# Altium PCB Test PCB Rev 1.PcbDoc
Units mil, origin at the board's own origin, x right, y up, seen from the top; angles counter-clockwise.
Board outline 5000 x 3000 mil, 4 copper layers (Top Layer, Layer 1, Layer 2, Bottom Layer), stack 23.756 mil thick; 158 components, 86 nets, 510 pads, 174 vias.
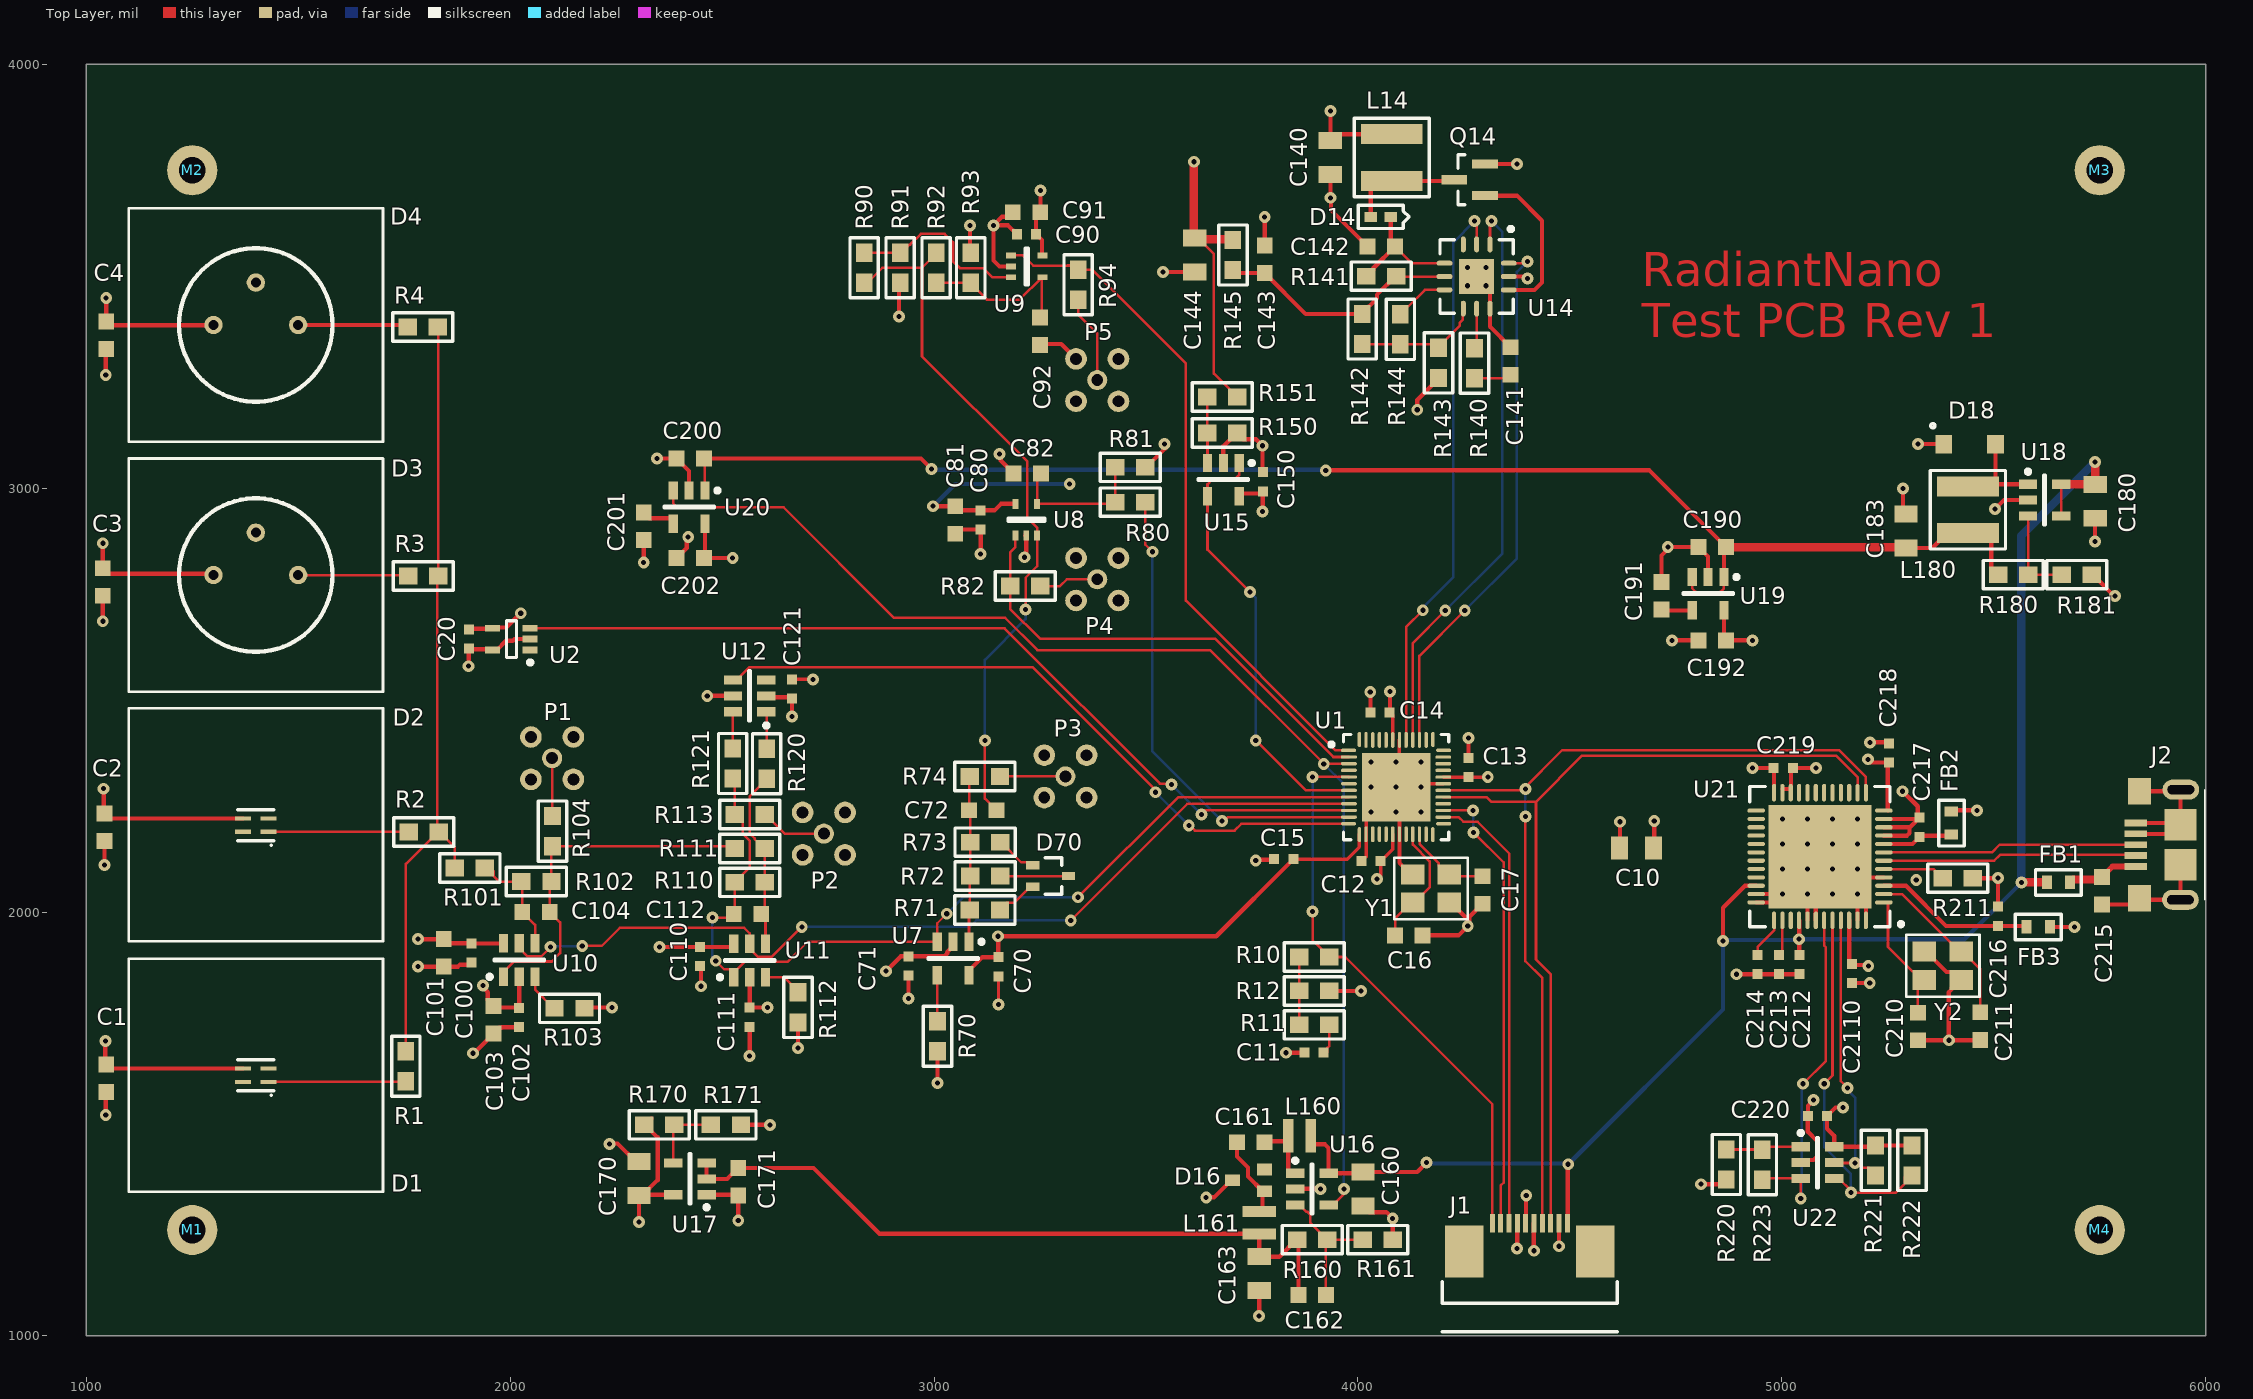
[diagram p0: Top Layer view]
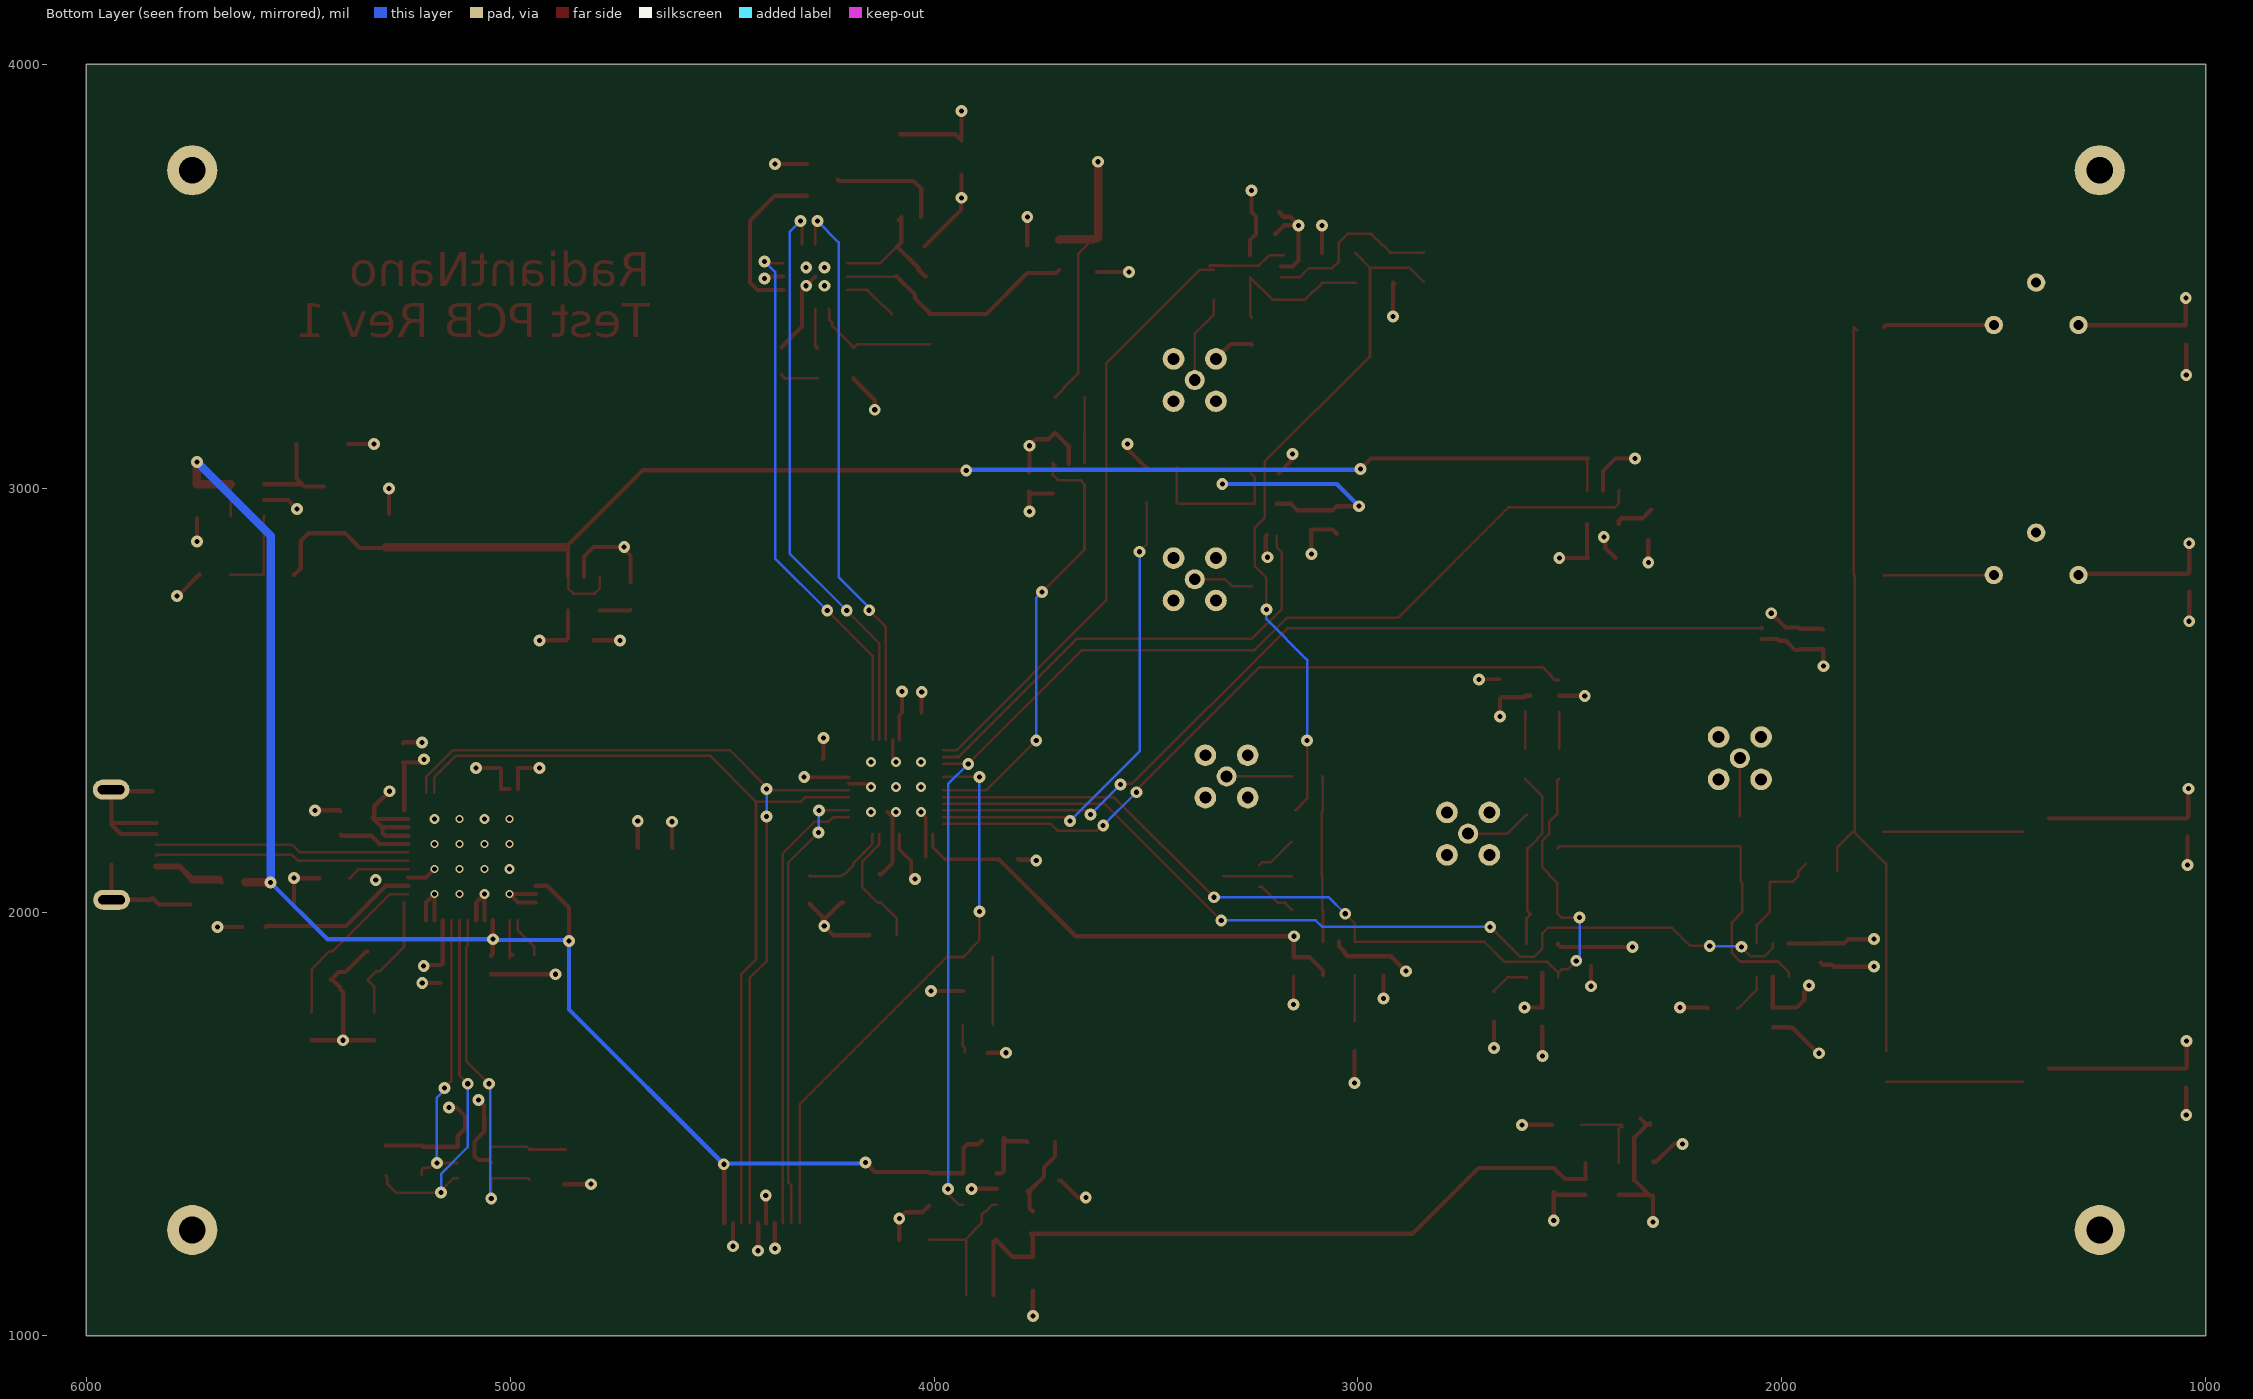
[diagram p1: Bottom Layer view, seen from below]
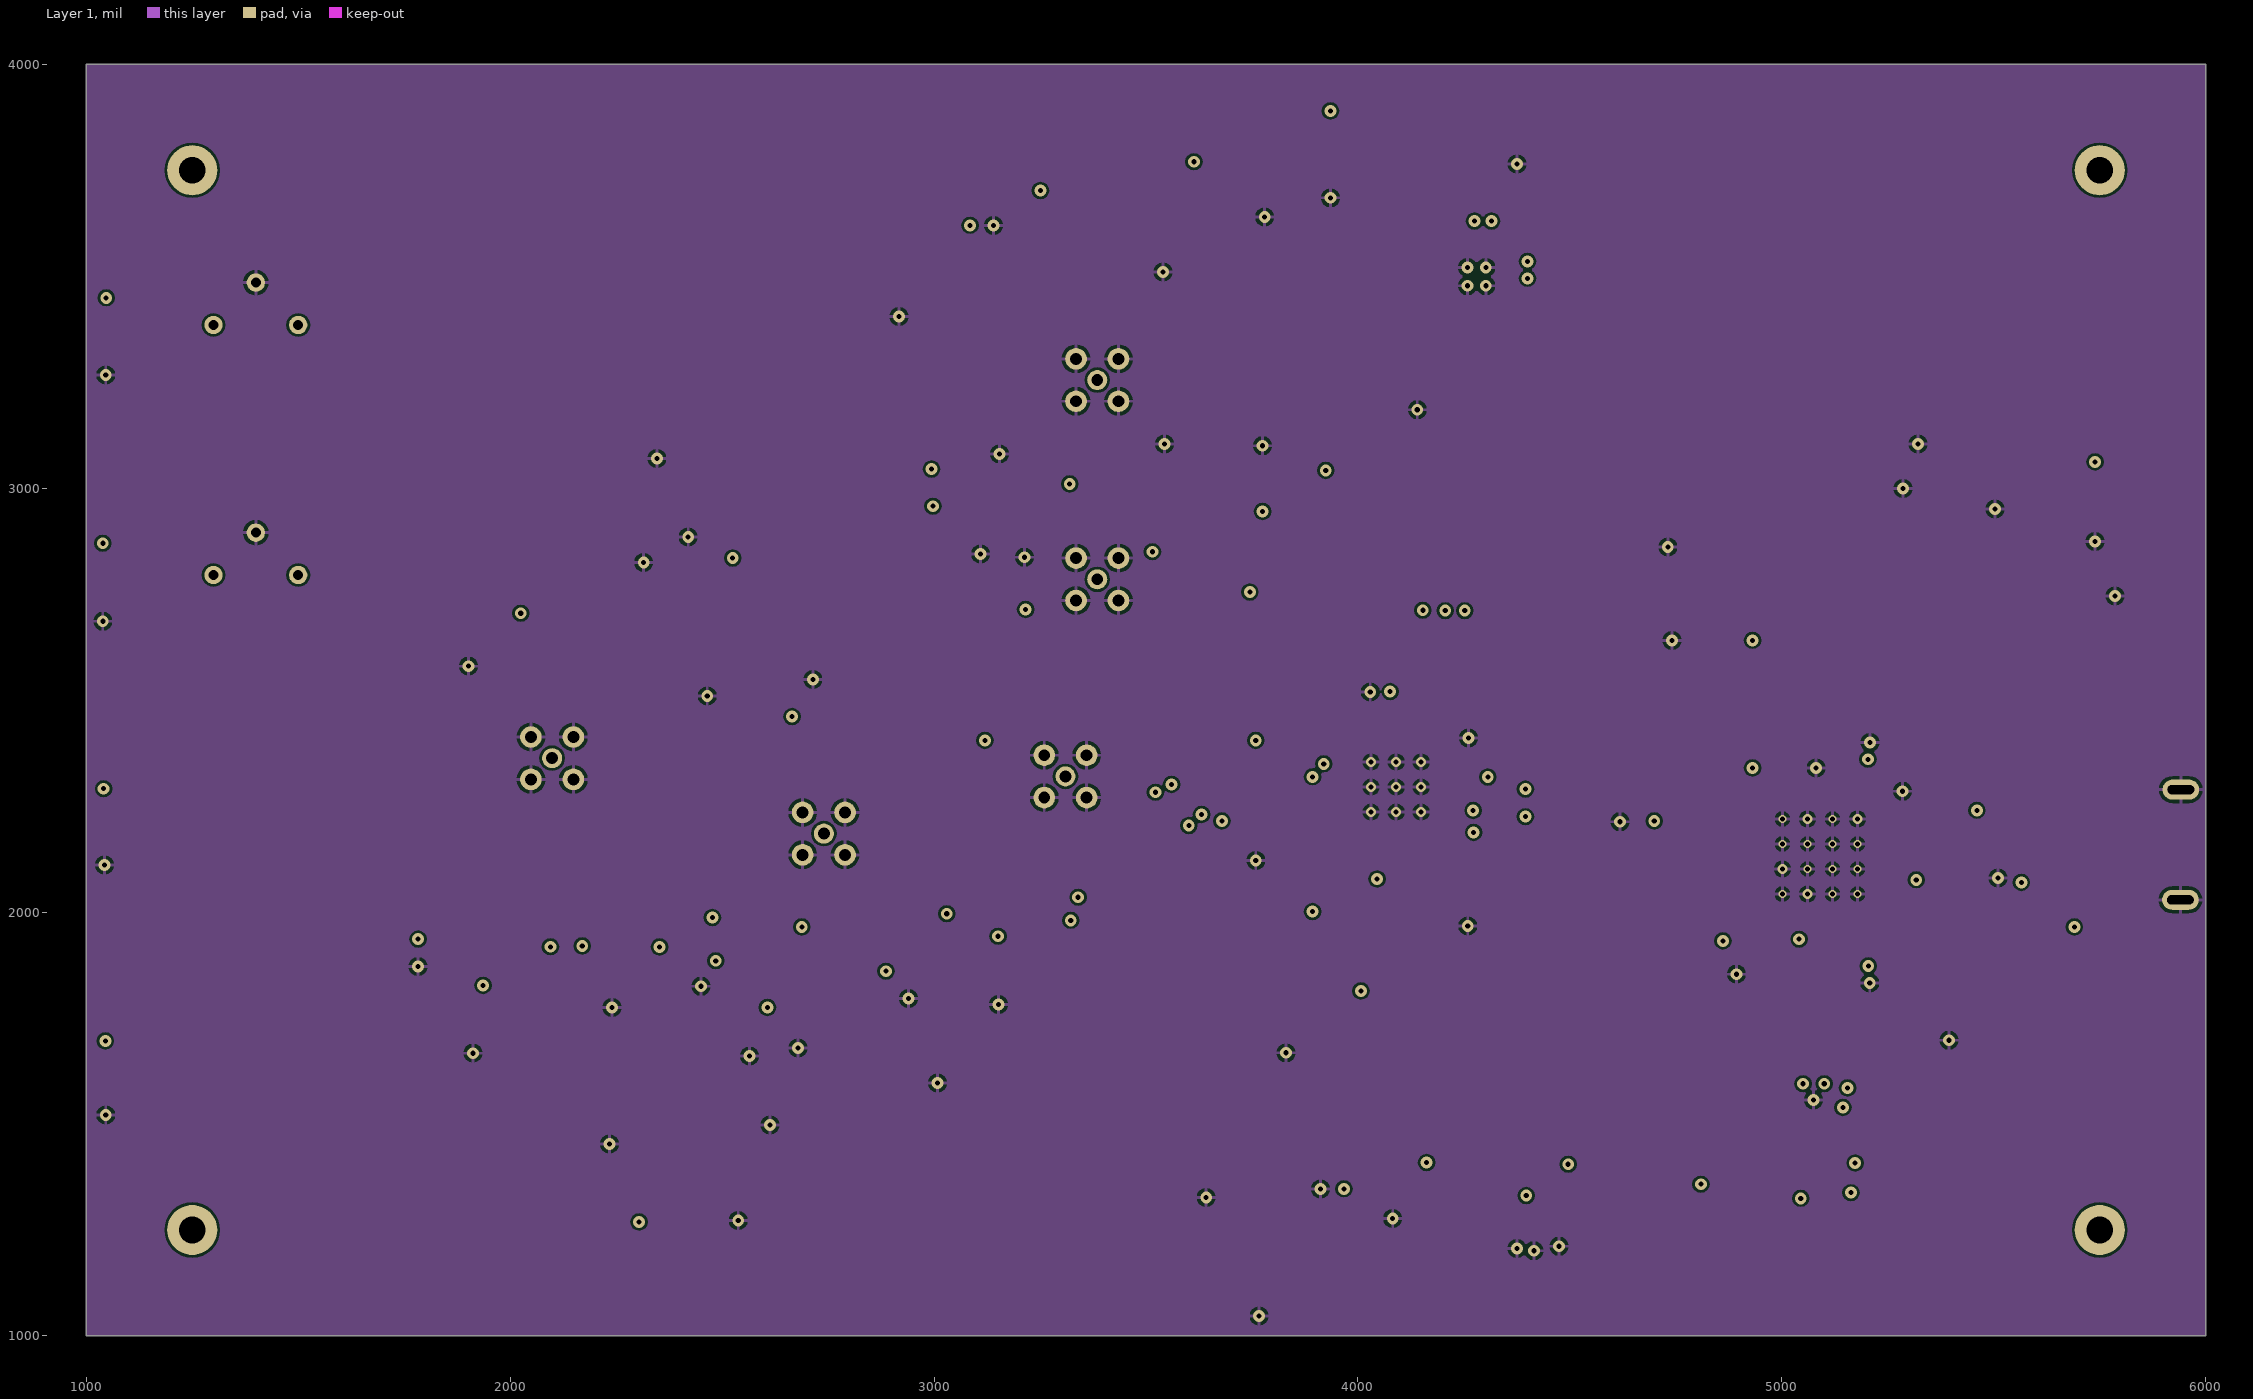
[diagram p2: Layer 1]
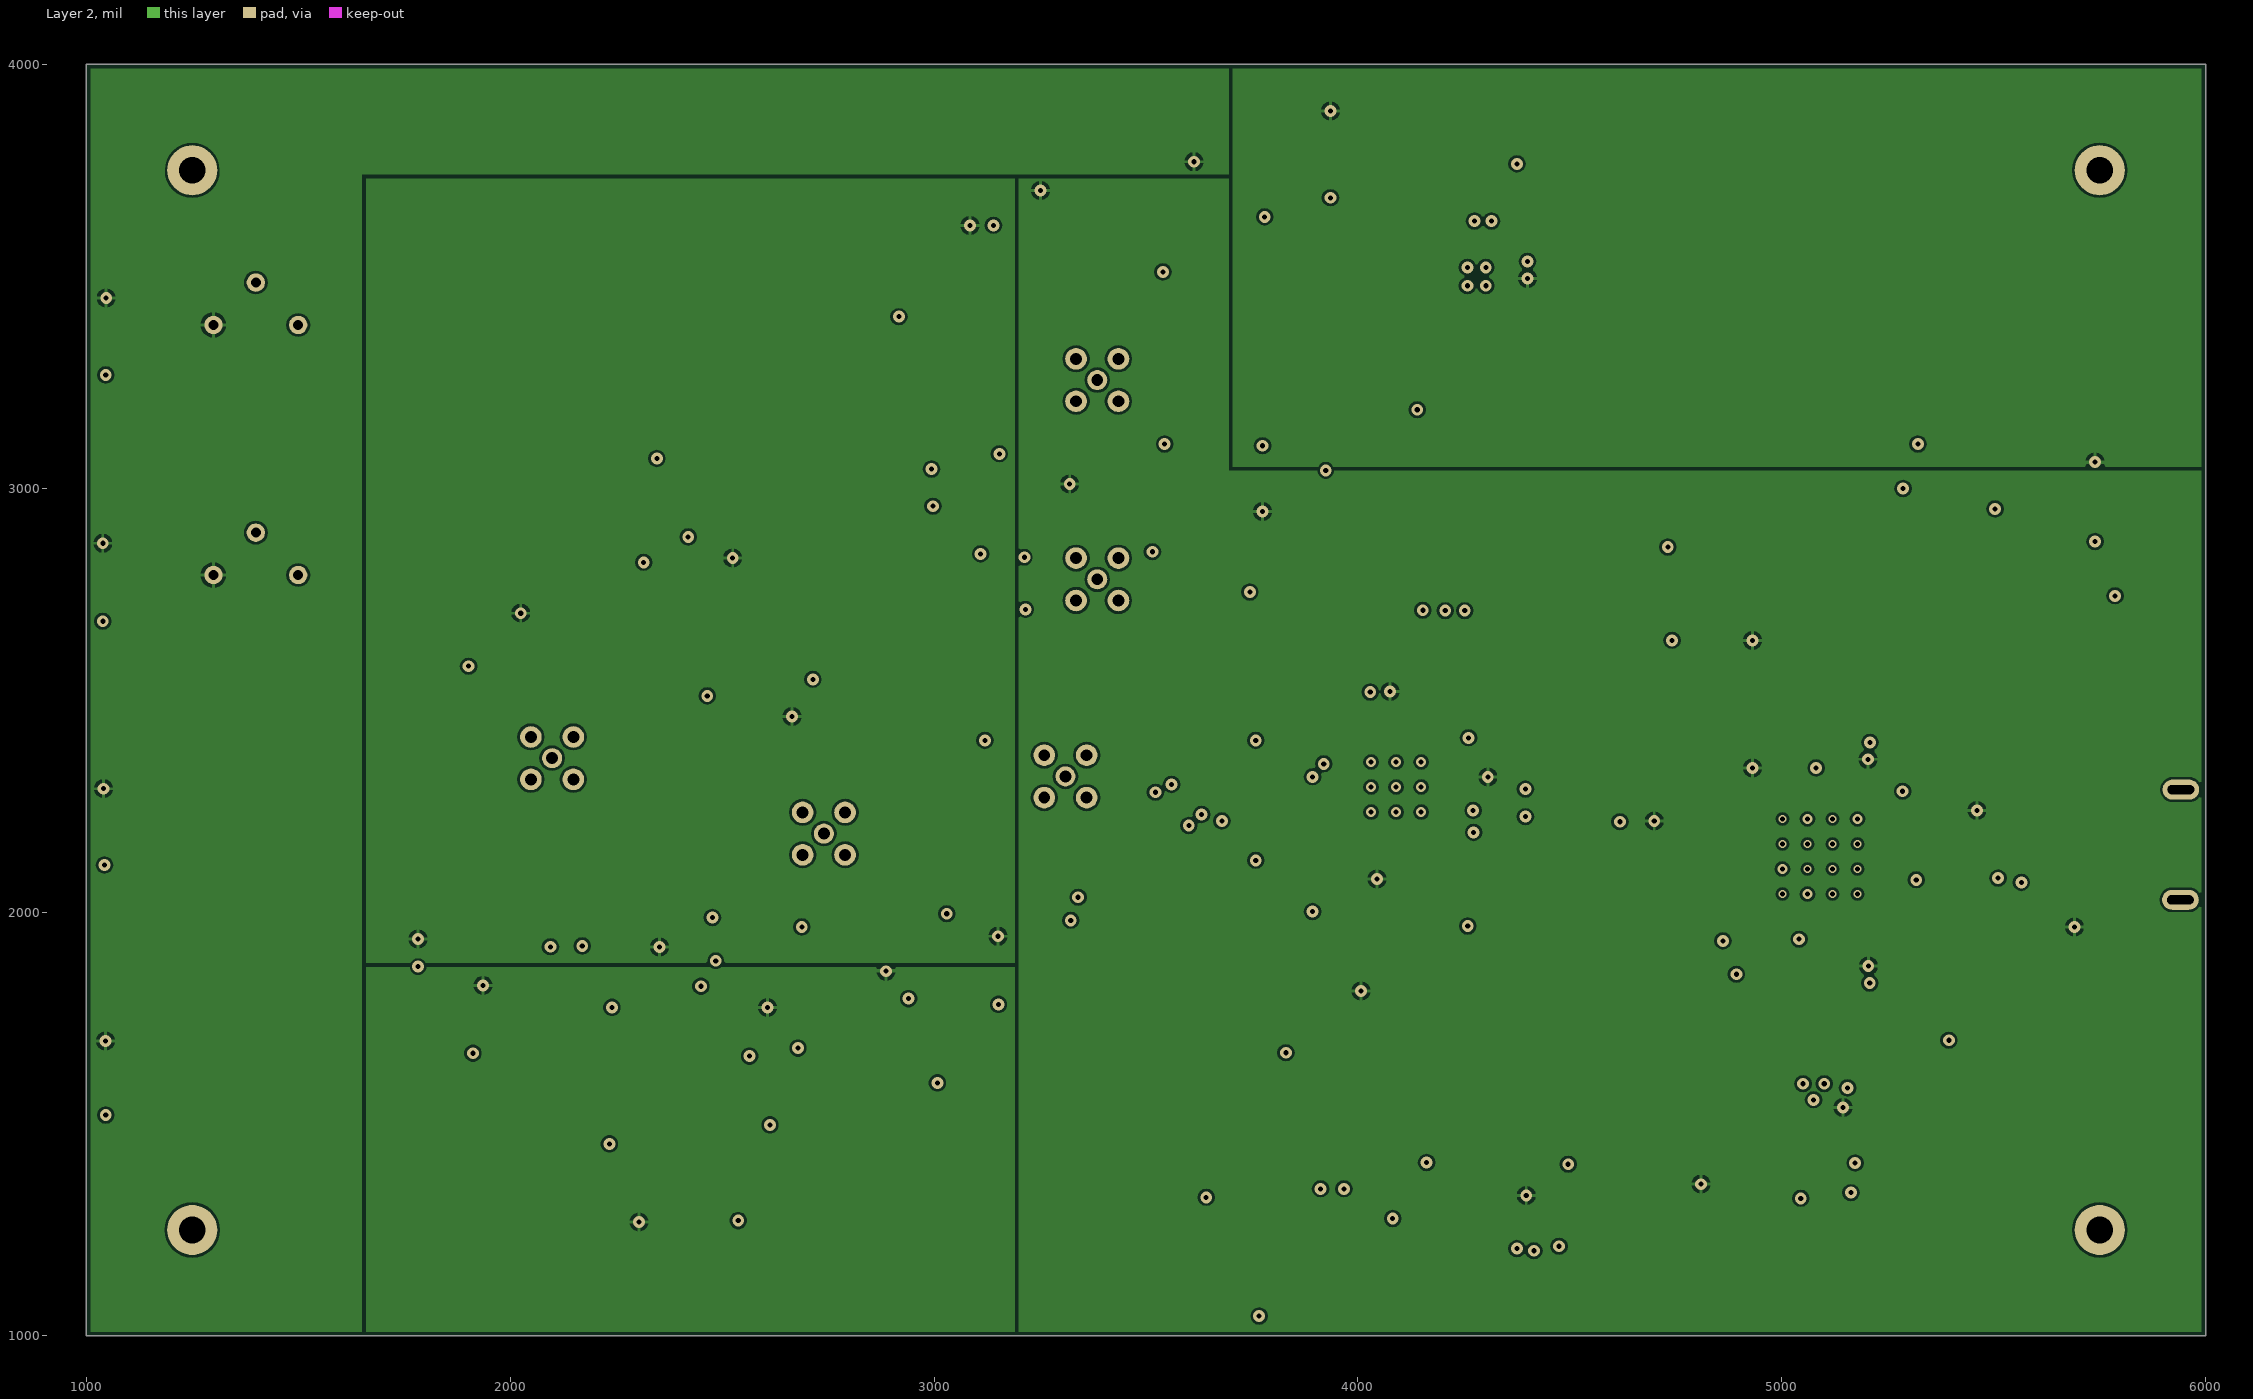
[diagram p3: Layer 2]

## Layer stack, top to bottom
Top Solder: solder mask 0.4, Solder Resist, Dk 3.5
Top Layer: signal copper 1.4
Dielectric 2: prepreg 2.8, PP-006, Dk 4.1
Layer 1: signal copper 1.378
Dielectric 1: dielectric 12.6, FR-4, Dk 4.8
Layer 2: signal copper 1.378
Dielectric 3: prepreg 2.8, PP-006, Dk 4.1
Bottom Layer: signal copper 1.4
Bottom Solder: solder mask 0.4, Solder Resist, Dk 3.5

## Board outline
1000,1000 6000,1000 6000,4000 1000,4000

## Design rules (kind name [scope] priority, off if disabled: settings)
Clearance [All] p1: gap=6 ignorepadtopadclearanceinfootprint=FALSE except(0: Arc-Hole Track-Hole SMDPad-Hole THPad-Hole Via-Hole Fill-Hole Poly-Hole Region-Hole Text-Hole)
HoleSize [All] p1: absolutevalues=TRUE maxlimit=100 minlimit=11.81 maxpercent=80.000 minpercent=20.000
MinimumSolderMaskSliver [All] p1: minsoldermaskwidth=3.75
PlaneClearance [All] p1: clearance=16
PlaneConnect [All] p1: planeconnectstyle=Relief reliefexpansion=14 reliefentries=4 reliefconductorwidth=8 reliefairgap=7
PolygonConnect [All] p1: connectstyle=Relief reliefconductorwidth=8 reliefentries=4 polygonreliefangle="90 Angle" airgapwidth=8
RoomDefinition "6 Power" [InComponentClass('6 Power')] p1: confinementstyle=ConfineOut formatcopy=TRUE lockcomponents=FALSE outline 7290,5965 7900,5965 7900,6275 7290,6275
RoomDefinition "5 SiPM" [InComponentClass('5 SiPM')] p2: confinementstyle=ConfineOut formatcopy=TRUE lockcomponents=FALSE outline 7280,6415 7685,6415 7685,6765 7280,6765
RoomDefinition "4 USB" [InComponentClass('4 USB')] p3: confinementstyle=ConfineOut formatcopy=TRUE lockcomponents=FALSE outline 7290,6805 7975,6805 7975,7305 7290,7305
RoomDefinition "3 Bias Supply" [InComponentClass('3 Bias Supply')] p4: confinementstyle=ConfineOut formatcopy=TRUE lockcomponents=FALSE outline 7285,7540 8025,7540 8025,7860 7285,7860
RoomDefinition "2 Analog" [InComponentClass('2 Analog')] p5: confinementstyle=ConfineOut formatcopy=TRUE lockcomponents=FALSE outline 7265,8075 8060,8075 8060,8355 7265,8355
RoomDefinition "1 PIC" [InComponentClass('1 PIC')] p6: confinementstyle=ConfineOut formatcopy=TRUE lockcomponents=FALSE outline 7270,8460 8045,8460 8045,8995 7270,8995
RoutingVias [All] p1: holewidth=12 width=28 viastyle="Through Hole" minholewidth=11.81 minwidth=23.62 maxholewidth=28 maxwidth=50
SilkToSilkClearance [All] p1: silktosilkclearance=6
SilkToSolderMaskClearance [IsPad] p1: minsilkscreentomaskgap=6 clearancetoexposedcopper=TRUE
SolderMaskExpansion [All] p1: expansion=2 istentingtop=FALSE
Width [All] p1: maxlimit=20 minlimit=6 preferedwidth=6
24 further rules are at their usual default settings.

## Classes and differential pairs
component class "6 Power": C160 C161 C162 C163 C170 C171 C180 C183 C190 C191 C192 C200 C201 C202 D16 D18 L160 L161 L180 R160 R161 R170 R171 R180 R181 U16 U17 U18 U19 U20
component class "5 SiPM": C1 C2 C3 C4 C20 D1 D2 D3 D4 R1 R2 R3 R4 U2
component class "4 USB": C210 C211 C212 C213 C214 C215 C216 C217 C218 C219 C220 C2110 FB1 FB2 FB3 J2 R211 R220 R221 R222 R223 U21 U22 Y2
component class "3 Bias Supply": C140 C141 C142 C143 C144 C150 D14 L14 Q14 R140 R141 R142 R143 R144 R145 R150 R151 U14 U15
component class "2 Analog": C70 C71 C72 C80 C81 C82 C90 C91 C92 C100 C101 C102 C103 C104 C110 C111 C112 C121 D70 P1 P2 P3 P4 P5 R70 R71 R72 R73 R74 R80 R81 R82 R90 R91 R92 R93 R94 R101 R102 R103 R104 R110 R111 R112 R113 R120 R121 U7 U8 U9 U10 U11 U12
component class "1 PIC": C10 C11 C12 C13 C14 C15 C16 C17 J1 M1 M2 M3 M4 R10 R11 R12 U1 Y1

## Components (designator, comment, footprint, x,y, rotation, side; value= is the part's Value field where it differs from the comment)
C1 "0.1uF/100V" C0603 1047,1608.28 r90 top
C2 "0.1uF/100V" C0603 1043,2200.36 r90 top
C3 "0.1uF/100V" C0603 1039,2778.68 r90 top
C4 "0.1uF/100V" C0603 1047,3361 r90 top
C10 "10uF" C0805 4657,2151 r0 top
C11 "0.1uF" C0402 3896,1669 r0 top
C12 "0.1uF" C0402 4031,2120 r0 top
C13 "0.1uF" C0402 4261,2341 r270 top
C14 "0.1uF" C0402 4052.36,2471 r0 top
C15 "0.1uF" C0402 3825,2125 r0 top
C16 "15pF" C0603 4120,1945 r180 top
C17 "15pF" C0603 4294,2052 r90 top
C20 "0.1uF" C0402 1903,2644 r90 top
C70 "0.1uF" C0402 3152,1871 r90 top
C71 "0.1uF" C0402 2940,1873 r90 top
C72 "1uF" C0603 3115,2240 r180 top
C80 "0.1uF" C0402 3110,2925 r90 top
C81 "1uF" C0603 3050,2925 r90 top
C82 "1nF" C0603 3220,3035 r0 top
C90 "0.1uF" C0402 3218,3599 r0 top
C91 "1uF" C0603 3218,3651 r0 top
C92 "150pF" C0603 3250,3370 r90 top
C100 "0.1uF" C0402 1908.4,1903.63 r90 top
C101 "1uF" C0603 1843.4,1903.63 r90 top
C102 "0.1uF" C0402 2021,1751 r90 top
C103 "1uF" C0603 1961,1746 r90 top
C104 "2.2pF" C0603 2061,2000 r0 top
C110 "0.1uF" C0402 2448,1895 r90 top
C111 "0.1uF" C0402 2565,1752 r90 top
C112 "10pF" C0603 2560,1995 r180 top
C121 "0.1uF" C0402 2665,2526 r270 top
C140 "10uF" C0805 3935,3780 r90 top
C141 "0.22uF" C0603 4360,3300 r270 top
C142 "0.1uF/100V" C0603 4055,3570 r0 top
C143 "0.1uF/100V" C0603 3780,3540 r270 top
C144 "1uF/100V" C0805 3615,3550 r90 top
C150 "0.1uF" C0402 3776,3015 r270 top
C160 "22uF" C0805 4012,1347 r90 top
C161 "0.47uF" C0603 3747,1457 r180 top
C162 "100pF" C0603 3892,1097 r180 top
C163 "10uF" C0805 3767,1147 r90 top
C170 "10uF" C0805 2304,1371 r270 top
C171 "1uF" C0603 2538,1364 r90 top
C180 "22uF" C0805 5739,2969 r90 top
C183 "22uF" C0805 5293,2899 r270 top
C190 "1uF" C0603 4836,2861 r0 top
C191 "470pF" C0603 4716,2746 r270 top
C192 "1uF" C0603 4836,2641 r0 top
C200 "1uF" C0603 2425,3070 r0 top
C201 "470pF" C0603 2315,2910 r90 top
C202 "1uF" C0603 2425,2835 r0 top
C210 "15pF" C0603 5321,1730 r90 top
C211 "15pF" C0603 5468,1731 r90 top
C212 "0.1uF" C0402 5042,1876 r90 top
C213 "0.1uF" C0402 4993,1876 r90 top
C214 "0.1uF" C0402 4943,1876 r90 top
C215 "1nF" C0603 5755,2050 r90 top
C216 "0.1uF" C0402 5510,1990 r270 top
C217 "0.1uF" C0402 5325,2200 r270 top
C218 "0.1uF" C0402 5253,2375.36 r270 top
C219 "0.1uF" C0402 5003.36,2340 r180 top
C220 "0.1uF" C0402 5084,1519 r0 top
C2110 "0.1uF" C0402 5165,1855 r90 top
D1 "MICRORB" MICRORB 1400,1615 r180 top
D2 "MICRORB" MICRORB 1400,2205 r180 top
D3 "S14420" "Photodiode 3pin 200mil" 1400,2795 r0 top
D4 "S14420" "Photodiode 3pin 200mil" 1400,3385 r0 top
D14 "BAT41KFILM" SOD523 4053.62,3640 r0 top
D16 "BAT54WT1G" SC70-3 3742,1367 r90 top
D18 "B0540WQ-7-F" SOD123W 5443,3104 r0 top
D70 "BAT54S" SOT323-3 3275,2085 r0 top
FB1 "MPZ1608S601ATA" MPZ1608 5652.56,2070 r180 top
FB2 "MPZ1608S601ATA" MPZ1608 5400,2210 r270 top
FB3 "MPZ1608S601ATA" MPZ1608 5605,1965 r180 top
J1 "1-1734839-0" 1-1734839-0 4316.89,1266 r0 top
J2 "USB Micro 11pad" "FCI 10118193" 5940.31,2158.82 r90 top
L14 "ASPI-4030S-101M-T" L_4018 4080,3780 r270 top
L160 "VLS2012ET-220M" L_2012 3862,1472 r180 top value=22uH
L161 "VLS2012ET-220M" L_2012 3767,1267 r270 top value=22uH
L180 "NR4012T100M" L_4018 5439,2949 r270 top
M1 "Mounting Hole" "Mounting Hole 0-80"#1 1225,1185 r0 top
M2 "Mounting Hole" "Mounting Hole 0-80"#2 1190,3800 r0 top
M3 "Mounting Hole" "Mounting Hole 0-80"#3 5845,3835 r0 top
M4 "Mounting Hole" "Mounting Hole 0-80"#4 5880,1155 r0 top
P1 "COAX-M" MMCX/SM 2099,2363 r90 top
P2 "COAX-M" MMCX/SM 2740,2185 r90 top
P3 "COAX-M" MMCX/SM 3310,2320 r270 top
P4 "COAX-M" MMCX/SM 3385,2785 r90 top
P5 "COAX-M" MMCX/SM 3385,3255 r0 top
Q14 "VN2110K1-G" SOT23-3 4263.58,3727.6 r180 top
R1 "0" R0603 1754,1636 r270 top
R2 "0" R0603 1796,2189 r180 top
R3 "0" R0603 1795,2793 r180 top
R4 "0" R0603 1794,3380 r180 top
R10 "100" R0603 3897,1894 r0 top
R11 "0" R0603 3897,1734 r180 top
R12 "10K" R0603 3897,1814 r0 top
R70 "100" R0603 3008,1707 r90 top
R71 "825" R0603 3120,2005 r180 top
R72 "549" R0603 3120.43,2085 r180 top
R73 "309" R0603 3120.43,2165 r180 top
R74 "453" R0603 3120,2320 r0 top
R80 "1k" R0603 3463,2967 r0 top
R81 "1k" R0603 3463,3049 r180 top
R82 "453" R0603 3215,2769 r0 top
R90 "100" R0603 2835,3520 r270 top
R91 "1k" R0603 2920,3520 r90 top
R92 "499" R0603 3005,3520 r90 top
R93 "100k" R0603 3086.6,3520 r90 top
R94 "453" R0603 3340,3479.57 r270 top
R101 "200" R0603 1905,2104 r0 top
R102 "1k" R0603 2062,2072 r0 top
R103 "200" R0603 2140,1773 r0 top
R104 "453" R0603 2100,2191 r90 top
R110 "2M" R0603 2565,2070 r180 top
R111 "200" R0603 2565,2150 r0 top
R112 "200" R0603 2679,1775 r270 top
R113 "453" R0603 2565,2230 r0 top
R120 "3.01k" R0603 2605,2350 r270 top
R121 "3.01k" R0603 2525,2350.43 r270 top
R140 "20K" R0603 4275,3295 r90 top
R141 "200" R0603 4055,3500 r0 top
R142 "590k" R0603 4010,3375.43 r90 top
R143 "36.5k" R0603 4190,3295.43 r90 top
R144 "24.9K" R0603 4100,3374.57 r270 top
R145 "20" R0603 3705,3550 r90 top
R150 "110k" R0603 3680,3130 r180 top
R151 "1M" R0603 3680,3215 r0 top
R160 "22.6K" R0603 3892,1227 r180 top
R161 "10K" R0603 4046.57,1227 r180 top
R170 "16.5K" R0603 2352,1498 r180 top
R171 "10K" R0603 2509,1498 r180 top
R180 "845K" R0603 5546,2796 r180 top
R181 "200K" R0603 5696,2796 r180 top
R211 "12K" R0603 5415,2080 r180 top
R220 "10K" R0603 4869,1404.43 r90 top
R221 "10K" R0603 5221,1414 r270 top
R222 "10K" R0603 5307,1414 r270 top
R223 "2K" R0603 4954,1404 r90 top
U1 "dsPIC33CK512MP605" QFN40P600X600X90_HS-49N 4090,2294.88 r0 top
U2 "STLM20W87F" SOT323-5 2003,2644 r180 top
U7 "MCP6L01" SOT23-5 3045,1890.63 r270 top
U8 "ADCMP600BRJZ" SC70-5 3217.6,2925.63 r90 top
U9 "ADCMP600BRJZ" SC70-5 3219,3523 r0 top
U10 "LT6230CS6-10#PBF" SOT23-6 2021.4,1886.63 r90 top
U11 "LT6230CS6-10#PBF" SOT23-6 2565,1885.63 r90 top
U12 "ADG751" SOT23-6 2565,2510 r180 top
U14 "MAX1932" QFN127P600-12N 4280,3499.21 r270 top
U15 "MCP6L01T-E/LT" SOT23-5 3682.48,3020 r270 top
U16 "LT1617ES5-1#TRMPBF" SOT23-5 3891.37,1346.57 r0 top
U17 "MAX1735" SOT23-5 2424,1370.43 r180 top
U18 "LM2831YMF/NOPB" SOT23-5 5620,2972 r0 top
U19 "TC1015-3.3VCT713" SOT23-5 4826,2751 r270 top
U20 "TC1015-3.3VCT713" SOT23-5 2422.09,2955 r270 top
U21 "FT232HQ" QFN50P800X800X100_HS-49N 5090,2131 r180 top
U22 "93LC56BT-I/OT" SOT23-6 5084,1409 r0 top
Y1 "ABM8G-12.000MHZ-4Y-T3" "7M Series XTAL" 4129,2022 r0 top
Y2 "ABM8G-12.000MHZ-4Y-T3" "7M Series XTAL" 5336.39,1840.07 r0 top

## Footprints (in the part's own frame and the unit in brackets; to place one, negate y for a bottom-side part, rotate by r counter-clockwise, add the part's x,y. Pads: shape width x height; smd on the part's side, far side on the other; paste and mask are expansions set on the pad)
1-1734839-0 [mm] "Flat flex connector, 10 position, 0.5mm pitch, right angle"
  rect 0.3x1.1 smd: 1(0,0) 2(0.5,0) 3(1,0) 4(1.5,0) 5(2,0) 6(2.5,0) 7(3,0) 8(3.5,0) 9(4,0) 10(4.5,0)
  rect 2.3x3.1 smd: 11(-1.67,-1.7) 12(6.17,-1.7)
  silkscreen extent -3,-6.5 7.5,-3.5, body extent -3,-4.8 7.5,0, height 2.05
"7M Series XTAL" [mm] "3.2 x 2.5 x 0.7 mm SMD Crystal"
  rect 1.4x1.2 smd mask+0.15: 1(0,0) 2(2.2,0) 3(2.2,1.7) 4(0,1.7)
  silkscreen extent -1.1,-1 3.3,2.7, body extent -0.5,-0.4 2.7,2.1, height 1
C0402 [mm]
  rect 0.6x0.6 smd: 1(-0.575,0) 2(0.575,0)
  body extent -0.53,-0.28 0.53,0.27, height 0.55
C0603 [mm] "Ceramic Capacitor 0603"
  rect 0.95x0.95 smd: 1(-0.825,0) 2(0.825,0)
  body extent -0.87,-0.48 0.87,0.48, height 0.9
C0805 [mil]
  rect 40x55 smd: 1(-40,0) 2(40,0)
  body extent -41,-27 41,27, height 50
"FCI 10118193" [mm] "USB Micro B, through hole"
  rect 0.4x1.35 smd: 1(-1.3,2.675) 2(-0.65,2.675) 3(0,2.675) 4(0.65,2.675) 5(1.3,2.675)
  rect 1.6x1.4 smd: 6(-3.2,2.45) 7(3.2,2.45)
  rect 1.9x1.9 smd: 8(-1.2,0) 9(1.2,0)
  rrect100% 1.2x2.2 hole 0.55 slot 1.6 at 90 deg: 10(-3.3,0) 11(3.3,-0.025)
  silkscreen extent -3.3,-1.45 3.3,-1.45, body extent -3.75,-2.15 3.75,2.9, height 2.7
L_2012 [mm] "Inductor 2x2x1.2mm, surface mount"
  rect 0.65x2 smd: 1(-0.675,0) 2(0.675,0)
  body extent -1,-1 1,1, height 1.2
L_4018 [mm] "Inductor surface mount"
  rect 1.2x3.7 smd: 1(-1.4,0) 2(1.4,0)
  silkscreen extent -2.35,-2.25 2.35,2.25, body extent -2,-2 2,2, height 1.8
MICRORB [mm] "SON, 4-Leads, Body 1.51.8mm, Pitch 0.80mm, IPC Medium Density"
  rect 0.95x0.25 smd: 1(-0.77,0.4) 2(-0.77,-0.4) 3(0.77,-0.4) 4(0.77,0.4)
  silkscreen extent -1.08,-0.93 1.07,1.25, body extent -0.93,-0.77 0.92,0.77, height 0.65
MMCX/SM [mil] "MMCX RF connector surface mount set in holes"
  round 47.24 hole 28 mask+5.91: 1(0,0)
  round 51 hole 28 mask+5.91: 2(-50,50) 3(-50,-50) 4(50,-50) 5(50,50)
  body extent -67,-67 67,67, height 173
"Mounting Hole 0-80"#1 [mil] "0-80 close fit hole with 118mil pad"
  round 118 hole 63.5 mask+5.91: 0(25,65)
"Mounting Hole 0-80"#2 [mil] "0-80 close fit hole with 118mil pad"
  round 118 hole 63.5 mask+5.91: 0(60,-50)
"Mounting Hole 0-80"#3 [mil] "0-80 close fit hole with 118mil pad"
  round 118 hole 63.5 mask+5.91: 0(-95,-85)
"Mounting Hole 0-80"#4 [mil] "0-80 close fit hole with 118mil pad"
  round 118 hole 63.5 mask+5.91: 0(-130,95)
MPZ1608 [mm] "Power line inductor"
  rect 0.6x0.8 smd mask+0.15: 1(-0.7,0) 2(0.7,0)
  silkscreen extent -1.37,-0.75 1.38,0.77, body extent -1.15,-0.55 1.15,0.55, height 0.8
"Photodiode 3pin 200mil" [mm] "Photodiode 3pin 200mil"
  round 1.1 hole 0.6: 1(-2.54,0) 2(2.54,0) 3(0,2.54)
  silkscreen extent -4.6,-4.6 4.6,4.6
QFN40P600X600X90_HS-49N [mm] "QFN, 48-Leads, Body 5.90x5.90mm, Pitch 0.40mm, Thermal Pad 4.10x4.10mm, IPC Medium Density, new"
  oval 0.9x0.2 smd: 1(-2.85,2.2) 12(-2.85,-2.2) 25(2.85,-2.2) 36(2.85,2.2)
  oval 0.95x0.2 smd: 2(-2.825,1.8) 3(-2.825,1.4) 4(-2.825,1) 5(-2.825,0.6) 6(-2.825,0.2) 7(-2.825,-0.2) 8(-2.825,-0.6) 9(-2.825,-1) 10(-2.825,-1.4) 11(-2.825,-1.8) 26(2.825,-1.8) 27(2.825,-1.4) 28(2.825,-1) 29(2.825,-0.6) 30(2.825,-0.2) 31(2.825,0.2) 32(2.825,0.6) 33(2.825,1) 34(2.825,1.4) 35(2.825,1.8)
  oval 0.2x0.9 smd: 13(-2.2,-2.85) 24(2.2,-2.85) 37(2.2,2.85) 48(-2.2,2.85)
  oval 0.2x0.95 smd: 14(-1.8,-2.825) 15(-1.4,-2.825) 16(-1,-2.825) 17(-0.6,-2.825) 18(-0.2,-2.825) 19(0.2,-2.825) 20(0.6,-2.825) 21(1,-2.825) 22(1.4,-2.825) 23(1.8,-2.825) 38(1.8,2.825) 39(1.4,2.825) 40(1,2.825) 41(0.6,2.825) 42(0.2,2.825) 43(-0.2,2.825) 44(-0.6,2.825) 45(-1,2.825) 46(-1.4,2.825) 47(-1.8,2.825)
  rect 4.1x4.1 smd: 49(0,0)
  silkscreen extent -4,-3.15 3.15,3.15, body extent -3,-3 3,3, height 0.9
QFN50P800X800X100_HS-49N [mm] "QFN, 48-Leads, Body 8.00x8.00mm, Pitch 0.50mm, Thermal Pad 6.20x6.20mm, IPC Medium Density"
  oval 1.05x0.25 smd: 1(-3.825,2.75) 2(-3.825,2.25) 3(-3.825,1.75) 4(-3.825,1.25) 5(-3.825,0.75) 6(-3.825,0.25) 7(-3.825,-0.25) 8(-3.825,-0.75) 9(-3.825,-1.25) 10(-3.825,-1.75) 11(-3.825,-2.25) 12(-3.825,-2.75) 25(3.825,-2.75) 26(3.825,-2.25) 27(3.825,-1.75) 28(3.825,-1.25) 29(3.825,-0.75) 30(3.825,-0.25) 31(3.825,0.25) 32(3.825,0.75) 33(3.825,1.25) 34(3.825,1.75) 35(3.825,2.25) 36(3.825,2.75)
  oval 0.25x1.05 smd: 13(-2.75,-3.825) 14(-2.25,-3.825) 15(-1.75,-3.825) 16(-1.25,-3.825) 17(-0.75,-3.825) 18(-0.25,-3.825) 19(0.25,-3.825) 20(0.75,-3.825) 21(1.25,-3.825) 22(1.75,-3.825) 23(2.25,-3.825) 24(2.75,-3.825) 37(2.75,3.825) 38(2.25,3.825) 39(1.75,3.825) 40(1.25,3.825) 41(0.75,3.825) 42(0.25,3.825) 43(-0.25,3.825) 44(-0.75,3.825) 45(-1.25,3.825) 46(-1.75,3.825) 47(-2.25,3.825) 48(-2.75,3.825)
  rect 6.2x6.2 smd: 49(0,0)
  silkscreen extent -4.98,-4.2 4.2,4.2, body extent -4.05,-4.05 4.05,4.05, height 1
QFN127P600-12N [mm]
  oval 0.95x0.3 smd: 1(-1.925,0.8) 2(-1.925,0) 3(-1.925,-0.8) 7(1.925,-0.8) 8(1.925,0) 9(1.925,0.8)
  oval 0.3x0.95 smd: 4(-0.8,-1.925) 5(0,-1.925) 6(0.8,-1.925) 10(0.8,1.925) 11(0,1.925) 12(-0.8,1.925)
  rect 2.1x2.1 smd: 13(0,0)
  silkscreen extent -2.97,-2.2 2.2,2.2, body extent -2.05,-2.05 2.05,2.05, height 0.8
R0603 [mm] "Chip Resistor, 2-Leads, Body 1.6x0.8mm, IPC Medium Density"
  rect 1.1x1 smd: 1(-0.9,0) 2(0.9,0)
  silkscreen extent -1.8,-0.85 1.8,0.85, body extent -0.7,-0.48 0.7,0.47, height 0.55
SC70-3 [mm] "SC-70 or SOT-323 three pin"
  rect 0.7x0.9 smd mask+0.15: 1(-0.65,-0.95) 2(0.65,-0.95) 3(0,0.95)
  body extent -1.05,-1 1.05,1, height 1
SC70-5 [mm]
  rect 0.6x0.35 smd: 1(-0.95,0.65) 2(-0.95,0) 3(-0.95,-0.65) 4(0.95,-0.65) 5(0.95,0.65)
  silkscreen extent -0.1,-1.1 0.1,1.1, body extent -1,-1.07 1,1.08, height 1.1
SOD123W [mm] "SODFL, 2-Leads, Body 1.70x3.50mm, IPC Medium Density"
  rect 1x1.1 smd: 1(-1.55,0) 2(1.55,0)
  silkscreen extent -2.32,0.98 -2.07,1.22, body extent -1.4,-0.95 1.4,0.95, height 1.1
SOD523 [mm] "Diode surface mount 1.2x0.8mm"
  rect 0.75x0.6 smd: 1(-0.6,0) 2(0.6,0)
  silkscreen extent -1.35,-0.7 1.7,0.7
SOT23-3 [mm] "SOT23, 3-Leads, Body 3.0x2.6mm (max), Pitch 0.95mm, IPC Medium Density"
  rect 1.55x0.55 smd: 1(-0.925,0.95) 2(-0.925,-0.95) 3(0.925,0)
  silkscreen extent 0.3,-1.5 0.7,1.5, body extent -1.1,-1.5 1.1,1.5, height 1.1
SOT23-5 [mm]
  rect 1.1x0.55 smd: 1(-1,0.95) 2(-1,0) 3(-1,-0.95) 4(1,-0.95) 5(1,0.95)
  silkscreen extent -1.12,-1.5 0.05,1.83, body extent -1.1,-1.5 1.1,1.5, height 1.1
SOT23-6 [mm]
  rect 1.1x0.55 smd: 1(-1,0.95) 2(-1,0) 3(-1,-0.95) 4(1,-0.95) 5(1,0) 6(1,0.95)
  silkscreen extent -1.12,-1.5 0.05,1.9, body extent -0.7,-1.5 0.7,1.5, height 1.1
SOT323-3 [mm] "SOT323, 3-Leads, Body 2.00x2.10mm, Pitch 0.65mm, IPC Medium Density"
  rect 0.8x0.5 smd: 1(-1.075,0.65) 2(-1.075,-0.65) 3(1.075,0)
  silkscreen extent -0.32,-1.1 0.67,1.1, body extent -0.67,-1.1 0.67,1.1, height 1.1
SOT323-5 [mm]
  rect 0.9x0.4 smd: 1(-1.125,0.65) 2(-1.125,0) 3(-1.125,-0.65) 4(1.125,-0.65) 5(1.125,0.65)
  silkscreen extent -1.25,-1.1 0.3,1.52, body extent -0.67,-1.1 0.67,1.1, height 1.1

## Part data
C1 C2 C3 C4 C10 C11 C12 C13 C14 C15 C16 C17 C20 C70 C71 C72 C80 C81 C82 C90 C91 C92 C100 C101 C102 C103 C104 C110 C111 C112 C121 C140 C141 C142 C143 C144 C150 C160 C161 C162 C163 C170 C171 C180 C183 C190 C191 C192 C200 C201 C202 C210 C211 C212 C213 C214 C215 C216 C217 C218 C219 C220 C2110: library part "Cap SM", "Capacitor, SM", LatestRevisionDate=29-May-2009, LatestRevisionNote="IPC-7351 Footprint Added.", PackageDescription="Chip Capacitor", PackageReference=C1206, Published=8-Jun-2000, Publisher="Altium Limited"
D1 D2: "SiPM"
D14: "Schottky diode", Part Number=BAT41KFILM
D16: library part BAT54W
D18: library part BAT46W, "Schottky diode"
FB1 FB2 FB3: library part "Ferrite Bead"
J1: library part "Header 10", "Header 10", LatestRevisionDate=17-Jul-2002, LatestRevisionNote="Re-released for DXP Platform.", Part Number=1-1734839-0, Publisher="Altium Limited"
L14: library part Inductor, "47uH inductor", Inductance=100uH, Part Number=ASPI-4030S-101M-T
L160 L161 L180: library part Inductor
P1 P2 P3 P4 P5: "RF Coaxial PCB Connector, MMCX; Thru-Hole, Vertical Mount Plug,  50 Ohm Impedance", PackageDocument="Rev. A, 16-Jun-1997", ComponentLink1Description="Manufacturer Link", ComponentLink1URL=http://www.amphenolrf.com/, DatasheetDocument=30-May-2003, DrillSize="Corresponds to nominal value.", LatestRevisionDate=15-Jul-2004, LatestRevisionNote="Component Replaced.", PackageReference=908-21103, PCB_Layout="Complies with manufacturer's recommendation.", Published=15-Jul-2004, Publisher="Altium Limited"
Q14: library part "N FET", "N FET", Part Number=DMN10H220L-7
R1 R2 R3 R4 R10 R11 R12 R70 R71 R72 R73 R74 R80 R81 R82 R90 R91 R92 R93 R94 R101 R102 R103 R104 R110 R111 R112 R113 R120 R121 R140 R141 R142 R143 R144 R145 R150 R151 R160 R161 R170 R171 R180 R181 R211 R220 R221 R222 R223: library part "Res SM", "Resistor", LatestRevisionDate=29-May-2009, LatestRevisionNote="IPC-7351 Footprint Added.", PackageDescription="Chip Resistor", PackageReference=J1-0603, Published=8-Jun-2000, Publisher="Altium Limited"
U1: "Microcontroller"
U2: library part STML20W87F
U7: "Op amp RRIO"
U8 U9: library part ADCMP600, "Comparator"
U10 U11: library part LMH6639, "Op amp, RRO"
U14: "APD bias supply", Part Number=MAX1932
U15: library part MCP6L01, "Op amp RRIO", Part Number=MCP6L01T-E/LT
U16: library part LT1617-1
U18: library part LM2831
U19 U20: library part TC1014
U21: "USB interface"
Y1 Y2: library part "Crystal 4 Terminal"

## Via types
v1: diameter 28, hole 12, Top Layer to Bottom Layer, 149 vias
v2: diameter 23.62/19.68/19.68/19.68 (per signal layer), hole 11.81, Top Layer to Bottom Layer, 12 vias
v3: diameter 23.62/23.62/23.62/23.62 (per signal layer), hole 11.81, Top Layer to Bottom Layer, 11 vias
v4: diameter 23.62, hole 11.81, Top Layer to Bottom Layer, 2 vias

## Nets (pads, with @x,y where several pads share a name; then routed paths per layer and width w, separated by ;. In a path a pad name is that pad's centre, name@x,y a point inside that pad or via, vN(x,y) a via of type N, cw(c..) or ccw(c..) an arc to the next point about the centre after c; other vN are vias at no path point)
"Analog Out": C112.2 R110.2 R113.1 R121.2 U1.8 U7.3 U11.1 | length 2226.8
  Top Layer w6: v1(2477,1987) 2519.52,1987 C112.2 2529.57,1997.05 R110.2 2531.54,2070 2548.22,2086.69 2548.22,2088.65 2565,2105.43 2565,2168.63 2548.22,2185.41 2548.22,2213.31 2531.54,2230 R113.1 2529.57,2310.43 R121.2 ; v1(2485,1885) 2505.09,1864.91 2519.77,1864.91 U11.1@2527.6,1857.09 ; U11.1 U11.1@2527.6,1857.09 ; v1(3030,1996) 3007.6,1973.6 U7.3 2702,1930 2654.35,1882.35 2552.86,1882.35 U11.1@2527.6,1857.09 ; v1(3340,2035) 3576.26,2271.26 U1.8
  Bottom Layer w6: v1(2477,1987) 2477,1893 v1(2485,1885) ; v1(3030,1996) 3069,2035 v1(3340,2035)
GND: C1.1 C2.1 C3.1 C4.1 C10.1 C11.1 C12.1 C13.1 C14.1 C15.1 C16.1 C17.1 C20.1 C70.1 C71.1 C80.1 C81.1 C82.1 C90.1 C91.1 C92.1 C100.1 C101.1 C102.1 C103.1 C110.1 C111.1 C121.1 C140.1 C141.1 C142.1 C143.1 C144.1 C150.1 C160.1 C163.1 C170.1 C171.1 C180.1 C183.1 C190.1 C191.1 C192.1 C200.1 C201.1 C202.1 C210.1 C211.1 C212.1 C213.1 C214.1 C215.1 C216.1 C217.1 C218.1 C219.1 C220.1 C2110.1 D3.3 D4.3 D16.3 D18.1 J1.4 J1.6 J1.9 J2.4 J2.5 J2.6 J2.7 J2.8 J2.9 J2.10 J2.11 P1.2 P1.3 P1.4 P1.5 P2.2 P2.3 P2.4 P2.5 P3.2 P3.3 P3.4 P3.5 P4.2 P4.3 P4.4 P4.5 P5.2 P5.3 P5.4 P5.5 Q14.2 R70.1 R81.1 R91.1 R103.2 R112.2 R143.1 R150.1 R161.1 R171.1 R181.1 R211.1 U1.14 U1.19 U1.31 U1.42 U1.49 U2.2 U2.5 U8.2 U9.2 U12.5 U14.9 U14.13 U15.2 U16.2 U17.1 U18.2 U19.2 U20.2 U21.4 U21.9 U21.10 U21.11 U21.22 U21.23 U21.35 U21.36 U21.41 U21.42 U21.47 U21.48 U21.49 U22.2 Y1.2 Y1.4 Y2.2 Y2.4 | length 8140.9
  Top Layer w8: C121.1 2665.18,2548.82 2713.82,2548.82 v1(2714,2549) ; v1(3152,1782) C70.1 ; C12.1@4019.13,2130.77 4019.13,2224.02 v3(4030.94,2235.83) ; U1.49@4090,2354.06 4097.87,2361.93 U1.42@4097.87,2406.22 ; v3(4149.06,2294.88) 4156.93,2302.76 U1.31
  Top Layer w10: v1(1039,2686) C3.1 C3.1@1039,2756.04 ; v1(1043,2111) C2.1 C2.1@1043,2177.72 ; v1(1046,1521) 1046,1584.64 C1.1@1047,1585.64 ; v1(1046,3267) 1046,3337.36 C4.1@1047,3338.36 ; v1(1782.85,1871.15) C101.1 1877.1,1871.15 1881.59,1875.64 1903.05,1875.64 C100.1 ; v1(1902,2580) 1902.5,2580.5 1902.5,2620.86 C20.1 1904.48,2619.89 1957.23,2619.89 U2.5 1968.55,2618.41 1990.14,2640 2006,2640 2010,2644 U2.2 ; v1(1912,1667) 1914.48,1667 1974.7,1727.22 1979.42,1727.22 1980.56,1728.36 C102.1 ; R103.2 2177.43,1775 v1(2240,1775) ; v1@2244,1454 2253.5,1454 2296.5,1411 C170.1 ; v1(2315,2825) C201.1 ; v1(2346,3070) C200.1 2422.09,3040.43 U20.2 ; C202.1 2416.56,2859.04 2416.56,2881.56 v1(2420,2885) v1@2422.09,2887.09 ; v1(2450,1825) C110.1@2450,1872.36 ; U17.1 2531.51,1333.03 2538,1339.52 C171.1 v1(2538,1272) ; v1(2465,2510) U12.5 ; R171.1@2542.46,1498 R171.1 v1(2613,1498) ; v1(2565,1660) C111.1 ; v1(2679,1679) R112.2 R112.2@2679,1741.57 ; R91.1@2914.48,3482.05 2917,3484.57 v1(2917,3404.57) ; v1(2940,1796) C71.1 ; v1(3008,1597) R70.1 ; C81.1 3059.84,2902.36 C80.1 v1(3110,2845) ; v1(3154,3081) 3157.44,3077.56 3157.44,3065.08 C82.1 ; U9.2 3154.2,3523 3140,3537.2 v1(3140,3620) ; C91.1 3174.94,3640.42 3160.42,3640.42 v1(3140,3620) ; C90.1 3174.36,3620 v1(3140,3620) ; v1(3213,2837) 3217.6,2841.6 3217.6,2886.26 U8.2@3214.89,2888.97 ; C92.1 3252.48,3340 3300,3340 P5.2 ; R81.1 3500.4,3049 3544,3092.6 v1(3544,3104) ; v1(3540,3510) C144.1 ; v1(3642,1327) 3660.66,1327 3700.66,1367 D16.3 ; U15.2@3682.48,3057.4 U15.2 3682.48,3099.02 3713.46,3130 R150.1 3730.12,3115.31 3759.69,3115.31 v1(3775,3100) 3775,3038.64 C150.1 ; v1(3759,2122) 3760.5,2123.5 3800.86,2123.5 C15.1 ; v1(3767,1047) C163.1 ; C143.1 v1(3780,3640) ; v1(3830,1668) C11.1@3873.36,1668 ; U16.2 3852.43,1347 v1(3912,1347) ; C140.1 v1(3935,3685) 3936.52,3683.48 3936.52,3656 C142.1 ; C160.1 4027,1292 4067,1292 v1@4077,1282 ; v1(4029,2519) 4029.36,2518.64 4029.36,2471.36 C14.1 ; R161.1 v1(4082,1277) ; U1.49@4109.69,2235.83 4097.87,2224.02 4097.87,2116.12 4125.06,2088.93 Y1.4 ; v1(4140,3185) 4140,3208.03 4190,3258.03 R143.1 ; C16.1 4237,1945 v1(4259,1967) ; Y1.2 4219.55,2022 4259,1982.55 v1(4259,1967) ; v1(4261,2411) C13.1 C13.1@4263.02,2361.62 ; U14.13 v1(4301.65,3477.56) 4311.5,3467.72 U14.9 4311.5,3380.98 C141.1 ; C17.1 4262.44,1987.96 4262.44,1970.44 v1(4259,1967) ; Q14.2 v1(4375,3765) ; v1(4375,1206) 4375.94,1206.94 J1.4 ; v1(4415,1201) 4415,1265.68 J1.6 ; v1(4474.37,1211.63) J1.9 ; C10.1 4618,2152 v1(4618,2213) ; C191.1 4716,2841.13 4731,2856.13 v1(4731,2861) C190.1 4826,2838.52 U19.2 ; v1(4741,2641) C192.1 ; v1(4892.64,1853.36) C214.1 C213.1 C212.1 C212.1@5045,1853.36 ; U21.36 4981.73,2022.73 v2(5001.42,2042.42) U21.35 ; U21.23@5001.42,2290.43 5021.1,2290.43 5021.45,2290.78 C219.1@5021.45,2338.22 ; C219.1@5022.45,2336.45 C219.1 v1(5081,2340) ; U22.2 5050.46,1414.83 5074.83,1414.83 5084,1424 5084,1459 5061.36,1481.64 C220.1 5061.68,1519.32 5061.68,1542.83 5075,1556.15 v1(5075,1557) ; U21.41 v4(5060.47,2042.42) 5080.16,2022.73 U21.42 ; C2110.1 v1(5207.36,1832.36) ; U21.47 v2(5178.58,2042.42) 5198.27,2022.73 U21.48 ; v2(5178.58,2101.47) 5198.27,2081.79 U21.4 ; v1(5208,2400.36) 5250.64,2400.36 C218.1 ; U21.9 5295.4,2180.21 5301.26,2186.07 5301.26,2198.9 5302.26,2199.9 ; U21.10 5302.26,2199.9 ; U21.11 C217.1@5321.94,2219.58 ; v1(5285,2285) 5320.55,2249.45 5320.55,2227.09 C217.1 C217.1@5321.94,2219.58 ; C183.1@5286,2939 v1(5286,2999) ; C210.1 v1(5394,1697.52) ; v1(5321,3104) D18.1 ; Y2.4 5340.32,1907 5388.63,1858.69 5404.38,1858.69 Y2.2 5419.06,1840.07 5400.44,1821.45 5400.44,1817.51 5394,1811.07 v1(5394,1697.52) ; R211.1 v1(5510,2080) C216.1 ; C211.1 5467,1697.52 v1(5394,1697.52) ; v1(5503,2951) 5524,2972 U18.2 ; R181.1 5733.4,2796 v1@5783.4,2746 ; v1(5739,2874) C180.1 ; C215.1 5828.54,2017.52 J2.6 5847.8,2028.9 J2.10 J2.8 ; J2.4 5918.66,2184.41 J2.9 ; J2.5 5936.38,2210 J2.9 ; J2.7 5937.36,2284.8 J2.11@5940.31,2287.76 ; J2.11 J2.11@5940.31,2287.76 ; 5302.26,2199.9 C217.1@5321.94,2219.58 ; J2.9 J2.11@5940.31,2287.76
  other v1: 2234,1453 5786,2746 4258.35,3477.56 4258.35,3520.87 4301.65,3520.87
  other v2: 5119.53,2042.42 5060.47,2101.47 5119.53,2101.47 5001.42,2160.53 5060.47,2160.53 5119.53,2160.53 5178.58,2160.53 5001.42,2219.58 5119.53,2219.58
  other v3: 5060.47,2219.58 5178.58,2219.58 4090,2235.83 4149.06,2235.83 4030.94,2294.88 4090,2294.88 4030.94,2353.94 4090,2353.94 4149.06,2353.94
  other v4: 5001.42,2101.47
HV: C1.2 C2.2 C3.2 C4.2 C144.2 D1.3 D2.3 D3.1 D4.1 R145.2 R151.2 | length 2119.1
  Top Layer w6: C144.2 3622.5,3590 3624.78,3587.72 3660,3552.5 3660,3270.43 3696.78,3233.65 3696.78,3231.69 3713.46,3215 R151.2
  Top Layer w10: v1(1039,2870) C3.2 1039,2801.32 1042.16,2798.16 1287.83,2798.16 1290.99,2795 D3.1 ; v1(1041,2291) 1041,2225 1045.17,2220.83 1369.61,2220.83 D2.3 ; v1(1045,1696) 1045,1632.91 1047.09,1630.83 1369.61,1630.83 D1.3 ; v1(1047,3449) C4.2 1047,3385 1047.68,3384.32 1299.32,3384.32 D4.1
  Top Layer w20: v1(3613,3770) 3613,3592 C144.2 ; C144.2@3624.78,3587.72 3702.72,3587.72 R145.2
MCLR: J1.1 R10.2 U1.5 | length 1337.7
  Top Layer w6: v1(3893,2001) 3893,1933.43 3913.78,1912.65 3913.78,1910.69 3930.46,1894 R10.2 3970,1894 4316.89,1547.11 J1.1 ; v1(3893,2319) 3893.25,2318.75 3978.53,2318.75 U1.5
  Bottom Layer w6: v1(3893,2001) v1(3893,2319)
NetC11_2: C11.2 R11.1 | length 67.1
  Top Layer w6: C11.2@3927.28,1669 3927.28,1679 3932.43,1684.16 R11.1
NetC16_2: C16.2 U1.21 Y1.1 | length 293.4
  Top Layer w6: C16.2 4087.52,1984.46 4125.06,2022 Y1.1 4132.94,2022 4169,2058.06 4169,2119.76 4129.37,2159.39 U1.21
NetC17_2: C17.2 U1.22 Y1.3 | length 209.3
  Top Layer w6: U1.22 4145.48,2183.3 4145.48,2160.52 4191.06,2114.94 4191.06,2109.55 4211.68,2088.93 Y1.3 4220.06,2084.48 C17.2 C17.2@4292.03,2086.45
NetC72_1: C72.1 R90.2 R92.2 U8.3 | length 1644.4
  Top Layer w6: R90.2@2845,3486.97 2878.03,3520 2971.54,3520 ; R92.2 3005,3553.46 2971.54,3520 ; v1(3120,2405) 3120,2267.48 C72.1 ; v1(3216,2714) 3216,2788.63 3243.19,2815.82 U8.3 3243.19,2906.81 3220,2930 3220,3062.53 2971.54,3310.99 2971.54,3520
  Bottom Layer w6: v1(3120,2405) 3120,2595 3216,2691 v1(3216,2714)
NetC72_2: C72.2 R71.2 R72.2 R73.2 R74.1 U7.1 | length 393
  Top Layer w6: U7.1 3082.4,2002.83 R71.2 3084.57,2084.57 R72.2 R73.2 3085,2237.52 C72.2 3082.52,2317.95 R74.1
NetC82_2: C82.2 R80.1 R81.2 U8.4 | length 343.8
  Top Layer w6: C82.2 3243.19,3025.71 U8.4 3423.6,2963.03 R80.1 R81.2
NetC92_2: C92.2 R92.1 R93.1 U9.4 | length 385.4
  Top Layer w6: R92.1 3085,3484.57 3085,3482.6 3101.69,3465.91 3103.65,3465.91 3124.57,3445 3201.96,3445 3254.37,3497.41 3254.37,3406.85 C92.2
NetC104_1: C104.1 R101.2 R102.1 U10.4 | length 266.6
  Top Layer w6: R101.2@1943.4,2114 1961.09,2096.31 1961.09,2084.91 1974,2072 R102.1 2028.52,2070.05 C104.1 2058.8,1969.72 U10.4
NetC104_2: C104.2 R102.2 R104.1 R111.1 U10.1 | length 860.7
  Top Layer w6: U10.1 1984,1858.09 2009.26,1883.35 2098.35,1883.35 2118,1903 2118,1975.48 C104.2 2093.48,2068.05 R102.2 2097.43,2153 R104.1 2524,2155.57 R111.1
NetC112_1: C112.1 R110.1 R111.2 R120.2 U11.4 | length 429.4
  Top Layer w6: U11.4 2602.4,1985.08 C112.1 2600.43,2002.95 R110.1 R111.2 2598.46,2150 2577,2171.46 2577,2173.6 2565,2185.6 2565,2272.6 2605,2312.6 R120.2
NetC141_2: C141.2 R140.1 | length 88.3
  Top Layer w6: R140.1 C141.2@4352.05,3259.57
  Top Layer w8: C141.2@4352.05,3259.57 C141.2
NetC142_2: C142.2 D14.2 R141.1 U14.4 | length 319
  Top Layer w6: D14.2 D14.2@4086.05,3631.19 ; C142.2 4126.77,3530.71 U14.4
  Top Layer w10: R141.1 4021.54,3500 4036.22,3514.69 4036.22,3518.74 C142.2 4077.24,3580.24 D14.2
NetC143_2: C143.2 R141.2 R142.2 R145.1 U14.5 | length 585.7
  Top Layer w6: R141.2 4091.22,3499.21 U14.5
  Top Layer w10: R145.1 3712.05,3507.52 C143.2 3876.65,3410.87 R142.2 4010,3412.83 4045,3447.83 4045,3456.54 4088.46,3500 R141.2
NetC161_1: C161.1 L160.2 U16.1 | length 156.3
  Top Layer w10: C161.1 3781.68,1459.2 3827.63,1459.2 3835.43,1467 3835.43,1389.8 3841.25,1383.97 U16.1
NetC161_2: C161.2 D16.1 L161.1 | length 197.7
  Top Layer w10: C161.2 3714.52,1423.3 3740.6,1397.22 3740.6,1376.27 3775.46,1341.41 D16.1 3774.8,1336.8 3774.8,1301.37 L161.1
NetC162_1: C162.1 R160.1 R161.2 U16.3 | length 336.2
  Top Layer w6: U16.3 3862.83,1309.17 3879.14,1292.85 3881.15,1292.85 3887,1287 3887,1267.43 3908.78,1245.65 3908.78,1243.69 R160.1@3925.46,1227 ; C162.1 3924.48,1226.02 R160.1@3925.46,1227 ; R161.2 R160.1 R160.1@3925.46,1227
NetC191_2: C191.2 U19.4 | length 73.4
  Top Layer w10: C191.2 4717.89,2711.63 U19.4
NetC201_2: C201.2 U20.4 | length 94.8
  Top Layer w10: C201.2@2308.11,2949.37 C201.2 2328.7,2928.78 2378.86,2928.78 2384.69,2922.95 U20.4
NetC210_2: C210.2 U21.1 Y2.1 | length 306.2
  Top Layer w6: U21.1@5250.43,2021.73 5250.43,1917.57 5307.31,1860.69 5315.76,1860.69 Y2.1 5321,1824.69 C210.2
NetC211_2: C211.2 U21.2 Y2.3 | length 403
  Top Layer w6: U21.2 5283.65,2042.42 5419.06,1907 Y2.3 5426.94,1907 5468,1865.94 C211.2
NetC213_2: C213.2 U21.38 | length 110.3
  Top Layer w6: C213.2 C213.2@5001.42,1907.06 ; C213.2@4995,1898.64 C213.2@5001.42,1905.06 ; C213.2@5001.42,1891.06 U21.38
NetC214_2: C214.2 U21.37 | length 97.8
  Top Layer w6: C214.2 4943,1918 4981.73,1956.73 U21.37
NetC215_2: C215.2 FB1.1 J2.1 | length 170.5
  Top Layer w10: FB1.1 FB1.1@5686.93,2076.81 ; C215.2@5749.33,2076.81 C215.2
  Top Layer w14: C215.2 5780.16,2107.64 J2.1
  Top Layer w20: FB1.1@5686.93,2076.81 C215.2@5749.33,2076.81
NetC216_2: C216.2 FB3.2 U21.3 | length 377.1
  Top Layer w10: U21.3 5292.7,2062.1 5387.44,1967.36 C216.2 5575.08,1967.36 FB3.2
NetC217_2: C217.2 FB2.2 U21.8 | length 168.5
  Top Layer w10: U21.8 5308.17,2160.53 5327.54,2179.9 5397.46,2179.9 FB2.2
NetD1_1: D1.1 R1.2 | length 323.7
  Top Layer w6: D1.1 R1.2@1754,1599.25
NetD2_1: D2.1 R2.2 | length 330.3
  Top Layer w6: D2.1 R2.2@1760.57,2189.25
NetD3_2: D3.2 R3.2 | length 260.4
  Top Layer w6: D3.2 1757.57,2795 R3.2
NetD4_2: D4.2 R4.2 | length 260.6
  Top Layer w10: D4.2 1753.57,3385 R4.2
NetD14_1: D14.1 L14.2 Q14.3 | length 272.3
  Top Layer w10: D14.1 4030,3706.26 4048.62,3724.88 L14.2 4224.45,3724.88 Q14.3
NetD18_2: D18.2 L180.1 U18.1 | length 243.9
  Top Layer w10: L180.1 5485.4,3004.12 L180.1@5490.69,3009.4 ; D18.2 5504.02,3022.74 L180.1@5490.69,3009.4 ; U18.1 L180.1@5490.69,3009.4
NetD70_1: D70.1 R73.1 | length 99.3
  Top Layer w6: R73.1 3157.83,2165 3205.4,2117.43 3225.83,2117.43 D70.1
NetD70_2: D70.2 R71.1 | length 99.8
  Top Layer w6: R71.1 3172.12,2021.69 3189.05,2021.69 3226.77,2059.41 D70.2
NetD70_3: D70.3 R72.1 | length 161.5
  Top Layer w6: R72.1 D70.3
NetJ1_7: J1.7 U1.30 U21.13 | length 2140.3
  Top Layer w6: U1.30 4387.01,2287.01 4482,2382 5135,2382 5198.27,2318.73 5198.27,2308 U21.13 ; v1(4395,2225) 4395,1884 4435,1844 J1.7
  Bottom Layer w6: v1(4395,2225) v1(4395,2290)
NetJ1_8: J1.8 U1.29 U21.14 | length 2093.3
  Top Layer w6: U1.29 4303.74,2271.26 4315,2260 4420,2260 ; J1.8 4454.69,1853.34 4420,1888.03 4420,2260 ; U21.14 5178.58,2318.42 5128,2369 4529,2369 4420,2260
NetJ2_2: J2.2 U21.6 | length 600.9
  Top Layer w6: U21.6 5501.16,2121.16 5515,2135 5833.23,2135 J2.2
NetJ2_3: J2.3 U21.7 | length 601.9
  Top Layer w6: U21.7 5495.84,2140.84 5513.82,2158.82 J2.3
NetP1_1: P1.1 R104.2 | length 138.9
  Top Layer w6: P1.1 2099,2227.43 R104.2 R104.2@2100,2228.4
NetP2_1: P2.1 R113.2 | length 158.2
  Top Layer w6: R113.2 2602.4,2230 2647.4,2185 P2.1
NetP3_1: P3.1 R74.2 | length 154.6
  Top Layer w6: R74.2 P3.1
NetP4_1: P4.1 R82.2 | length 141.2
  Top Layer w6: R82.2 3297,2769 3313,2785 P4.1
NetP5_1: P5.1 R94.2 | length 207.8
  Top Layer w6: R94.2 3340,3410 3385,3365 P5.1
NetQ14_1: Q14.1 U14.10 | length 389.9
  Top Layer w10: Q14.1 4300.2,3690 4375,3690 4434,3631 4434,3485 4416.72,3467.72 U14.10
NetR1_1: R1.1 R2.1 R3.1 R4.1 R101.1 | length 1862.4
  Top Layer w6: R1.1 1754,2113.54 1829.46,2189 R2.1 1833.4,2189 1869,2153.4 R101.1@1869,2097 ; R4.1@1822.43,3373 R4.1 ; R2.1@1828.46,2189 1828.46,2793 R3.1 R4.1@1830.43,3380
NetR10_1: R10.1 R11.2 R12.1 | length 160
  Top Layer w6: R11.2 R12.1 R10.1
NetR70_2: R70.2 U7.4 | length 109
  Top Layer w6: U7.4 3007.6,1742.83 R70.2
NetR80_2: R80.2 U1.11 | length 1130.3
  Top Layer w6: R80.2 3498.43,2866.57 v1(3515,2850) ; v1(3679,2215) 3684.95,2215 3693.97,2224.02 U1.11
  Bottom Layer w6: v1(3515,2850) 3515,2379 v1(3679,2215)
NetR82_1: R82.1 U1.2 U8.1 | length 1122
  Top Layer w6: U8.1 3192.01,2861.01 3179.57,2848.57 R82.1 3179.57,2715.43 3250,2645 3663,2645 3942.25,2365.75 U1.2
NetR90_1: R90.1 R91.2 U9.3 | length 425.5
  Top Layer w6: R90.1@2844.57,3556.3 2845,3555.87 2925,3555.87 2925,3557.83 2941.69,3574.52 2943.65,3574.52 2969.13,3600 3025,3600 3045,3580 3045,3535 3061,3519 3116,3519 3137.59,3497.41 U9.3
NetR94_1: R94.1 U1.1 U9.1 | length 1621.8
  Top Layer w6: U9.1@3175.63,3549.8 3209.16,3549.8 3233.96,3525 3314.57,3525 3314.83,3525.26 3348.29,3525.26 R94.1@3350.26,3523.29 ; R94.1 3373.46,3515 3594,3294.46 3594,2735 3947.5,2381.5 U1.1 U1.1@3978.78,2381.5
NetR103_1: R103.1 U10.3 | length 94.4
  Top Layer w6: U10.3 2058.8,1816.8 2102.6,1773 R103.1
NetR112_1: R112.1 U11.3 | length 94.3
  Top Layer w6: U11.3@2600.43,1844.29 2602.14,1846 2647.4,1846 2679,1814.4 R112.1@2679,1812.43
NetR120_1: R120.1 U12.1 | length 87.4
  Top Layer w6: U12.1 2605,2471.97 R120.1
NetR121_1: R121.1 U12.6 | length 87
  Top Layer w6: R121.1 2525,2471.97 U12.6
NetR140_2: R140.2 U14.8 | length 95.1
  Top Layer w6: R140.2@4280,3335.43 U14.8
  Top Layer w8: R140.2 R140.2@4280,3335.43
NetR142_1: R142.1 R143.2 R144.2 U14.7 | length 300.6
  Top Layer w6: R142.1 4010.87,3339.13 R144.2 4181.73,3339.13 R143.2 4190,3332.83 4240,3382.83 4240,3390 4247.39,3397.39 4247.39,3422.31 U14.7
NetR144_1: R144.1 U14.6 | length 129.3
  Top Layer w6: R144.1 4100,3411.97 4116.69,3428.65 4118.65,3428.65 4157.72,3467.72 U14.6
NetR150_2: R150.2 R151.1 U15.3 | length 155.8
  Top Layer w6: R151.1 R150.2 3645.08,3129.49 U15.3
NetR170_1: R170.1 R171.2 U17.4 | length 191.3
  Top Layer w6: R170.1@2376,1492.57 R170.1@2376.43,1493 ; U17.4 2384.63,1489.8 2376.43,1498 R171.2
NetR180_1: R180.1 R181.2 U18.3 | length 218.1
  Top Layer w6: U18.3 5581.43,2933.8 R180.1 R181.2
NetR211_2: R211.2 U21.5 | length 148.6
  Top Layer w6: U21.5 5357.4,2101.47 5360.91,2097.96 5360.91,2096.69 5377.6,2080 R211.2
NetR220_2: R220.2 R223.2 U22.1 | length 178.3
  Top Layer w6: R220.2 4954.43,1439.87 4960.97,1446.4 U22.1
NetR221_2: R221.2 U21.45 U22.5 | length 692.8
  Top Layer w6: U22.5 5124.37,1408 5178.95,1408 5189.73,1397.22 5204.31,1397.22 5209,1392.54 R221.2@5209,1378.57 ; U21.45 5139.21,1600.79 v1(5155,1585)
  Bottom Layer w6: v1(5155,1585) 5155,1580.05 5173,1562.05 v1(5173,1408)
NetR222_2: R222.2 U21.44 U22.4 | length 889.9
  Top Layer w6: v1(5100,1595) 5119.53,1614.53 U21.44 ; U22.4 5134.2,1371.6 5163,1342.8 v1(5163,1338) 5269,1338 5290.31,1359.31 5290.31,1374.88 R222.2@5294,1378.57
  Bottom Layer w6: v1(5100,1595) 5100,1445.47 5163,1382.47 v1(5163,1338)
NetR223_1: R223.1 U21.43 U22.3 | length 821.8
  Top Layer w6: R223.1 4957.03,1371.6 U22.3 v1(5044.63,1324.63) ; v1(5050,1595) 5104,1649 5104,1917 5099.84,1921.16 U21.43
  Bottom Layer w6: v1(5044.63,1324.63) 5047.31,1327.31 5047.31,1592.31 v1(5050,1595) v1@5050.63,1594.37
NetU1_3: U1.3 U16.4 U20.3 | length 2961
  Top Layer w6: U20.3@2384.06,2995 U20.3 2384.69,2964.31 2394,2955 2645,2955 2906,2694 3168,2694 3244,2618 3651.38,2618 3919.39,2350 U1.3 ; U16.4 3941.57,1309.17 3967,1334.6 v1(3967,1347)
  Bottom Layer w6: v1(3919.39,2349.61) 3967,2302 v1(3967,1347)
NetU1_7: U1.7 U15.1 U15.4 | length 1039.3
  Top Layer w6: U15.1@3713.02,3052.07 U15.1@3718,3057.04 ; U15.1 3719.88,3030.88 3708,3019 3655,3019 3645.08,3009.08 U15.4 3645.08,2854.92 v1(3745,2755) ; v1(3759,2405) 3876.99,2287.01 U1.7
  Bottom Layer w6: v1(3745,2755) 3759,2741 v1(3759,2405)
NetU1_9: U1.9 U10.5 U11.5 | length 2203.9
  Top Layer w6: U10.5 2021.4,1915.17 2041.23,1895.35 2073.36,1895.35 2095,1916.99 v1(2095,1918) ; v1(2170,1920) 2216,1920 2259,1963 2552,1963 2565,1950 U11.5 2565,1914.17 2584.83,1894.35 2616.96,1894.35 v1@2687.8,1965.2 ; v1(3322.5,1980.5) 3597.51,2255.51 U1.9
  Bottom Layer w6: v1(2095,1918) 2096,1919 2169,1919 v1(2170,1920) ; v1(2688,1965) 3084,1965 3099.5,1980.5 v1(3322.5,1980.5)
NetU1_10: U1.10 U2.3 | length 2117.7
  Top Layer w6: U2.3@2047.29,2669.3 3166.7,2669.3 3533,2303 3558.47,2303 v1(3560.24,2301.24) ; v1(3631.21,2230.26) 3640.72,2239.76 U1.10
  Top Layer w10: U2.3 U2.3@2047.59,2669.3
  Bottom Layer w6: v1(3560.24,2301.24) v1(3631.21,2230.26)
NetU1_12: U1.12 U12.4 | length 1636.8
  Top Layer w6: U12.4 2536.46,2547.4 2544.28,2555.23 2544.28,2557.57 2564.71,2578 3232,2578 3522.24,2287.76 v1(3522.24,2282.67) ; v1(3601,2204) 3603.51,2204 3615.51,2192 3709,2192 3725.27,2208.27 U1.12@3978.78,2208.27
  Bottom Layer w6: v1@3522.28,2282.67 v1(3601,2204)
NetU1_39: U1.39 U14.12 | length 1280.5
  Top Layer w6: U1.39 4145.12,2604.12 v1(4252,2711) ; U14.12 4395.71,3530.71 v1(4400,3535)
  Bottom Layer w6: v1(4252,2711) 4375,2834 4375,3510 v1(4400,3535)
NetU1_40: U1.40 U14.1 | length 1378
  Top Layer w6: U1.40 4129.37,2634.37 v1(4206,2711) ; U14.1 4311.5,3626.5 v1(4315,3630)
  Bottom Layer w6: v1(4206,2711) 4340,2845 4340,3605 v1(4315,3630)
NetU1_41: U1.41 U14.2 | length 1347.8
  Top Layer w6: U1.41 4113.62,2672.62 v1(4153,2712) ; v1(4275,3630) 4280,3625 U14.2
  Bottom Layer w6: v1(4153,2712) 4153,2718 4225,2790 4225,3580 v1(4275,3630)
PGC: J1.2 U1.27 | length 1077.3
  Top Layer w6: U1.27 v1(4271.76,2239.76) ; v1(4273,2188) 4344,2117 4344,1362 4336.57,1354.57 J1.2
  Bottom Layer w6: v1(4271.76,2239.76) 4272.38,2239.15 4272.38,2188.62 v1(4273,2188)
PGD: J1.3 U1.26 | length 1063.7
  Top Layer w6: U1.26 4237.64,2224.02 4248.65,2213 4282,2213 4357,2138 4357,1266.74 J1.3
V3.3: C10.2 C12.2 C13.2 C14.2 C80.2 C81.2 C90.2 C91.2 C150.2 C192.2 C218.2 C219.2 C220.2 C2110.2 FB2.1 FB3.1 J1.5 R12.2 R220.1 R221.1 R222.1 U1.18 U1.32 U1.43 U8.5 U9.5 U15.5 U19.5 U21.12 U21.24 U21.46 U22.6 | length 2396.1
  Top Layer w8: v1(4045,2078) 4053.64,2086.64 C12.2 4082.13,2148.49 U1.18 ; C14.2 4082.06,2463.94 4082.06,2406.17 U1.43 ; U1.32 4201.28,2318.44 4260.92,2318.44 C13.2 v1(4306.36,2318.36)
  Top Layer w10: v1(2997.48,2957.48) C81.2 3059.84,2947.64 C80.2 3142.36,2947.64 3157.76,2963.03 U8.5 ; v1(3251,3702) 3251,3651.52 C91.2 3240.64,3641.16 C90.2 3254.37,3585.27 U9.5@3254.37,3549.8 ; U15.5@3719.88,2987.48 3771.12,2987.48 C150.2@3775.5,2991.86 ; v1(3775,2945) 3775.5,2945.5 C150.2@3775.5,2991.86 ; C150.2 C150.2@3775.5,2991.86 ; R12.2 v1(4007,1814) ; C14.2 4075.5,2471.5 4075.5,2519.5 v1(4076,2520) ; J1.5 4396.31,1266.68 4396.31,1330.32 v1(4397,1331) ; C10.2 4699,2153 v1(4699,2215) ; v1(4809,1358) R220.1@4873.14,1358 ; U19.5 4863.4,2646.08 C192.2 v1(4931,2641) ; v1(4931,2340) C219.2 C219.2@4982.39,2338.34 ; C219.2@4981.39,2338.34 4981.39,2290.78 U21.24@4981.73,2290.43 ; v1(5144,1539) 5126.64,1539 C220.2 5106.64,1488.96 5123.37,1472.23 U22.6 5205.97,1446.4 5209,1449.43 R222.1@5294,1449.43 ; U21.46 5158.9,1878.74 5162.32,1875.32 5201.68,1875.32 v1(5204,1873) ; v1(5203,2360.36) 5210.64,2352.72 C218.2@5250,2352.72 ; U21.12@5250.43,2239.27 5250,2239.7 C218.2@5250,2352.72 ; C218.2 C218.2@5250,2352.72 ; FB2.1 5402.44,2240 v1(5460,2240) ; FB3.1 v1(5690,1965)
  Bottom Layer w10: v1(2997.48,2957.48) 3050,3010 v1(3320,3010)
V3.3A: C15.2 C20.2 C70.2 C100.2 C101.2 C110.2 C121.2 C202.2 R93.2 U1.13 U2.4 U7.5 U10.6 U11.6 U12.2 U20.5 | length 1965.5
  Top Layer w8: C15.2 3975,2125 4003.39,2153.39 U1.13@4003.39,2183.66
  Top Layer w10: v1(1782.89,1936.11) C101.2 1853.24,1926.27 C100.2 ; C20.2 1904.48,2668.11 1957.23,2668.11 U2.4 1960.54,2671.43 1991.43,2671.43 v1(2025,2705) ; C100.2@1908.4,1926 U10.6 ; v1(2352.36,1917.64) C110.2 2521.77,1917.64 2527.6,1923.46 U11.6 ; U20.5 2459.49,2837.01 C202.2 v1(2525,2835) ; U12.2@2593.54,2510 U12.2 2607.69,2506.68 2661.68,2506.68 C121.2 v1(2665,2461) ; U7.5 3082.4,1862.09 3113.95,1893.64 C70.2 3151.5,1894.14 3151.5,1942.5 v1(3151,1943) 3665.64,1943 C15.2 ; R93.2@3085,3555.43 v1(3085,3620)
V4: C183.2 C190.2 C200.2 L180.2 R180.2 U19.1 U19.3 U20.1 | length 3528.2
  Top Layer w6: C200.2 2459.49,3067.99 U20.1 ; U19.3 4788.6,2763.4 4801,2751 4851,2751 4863.4,2763.4 U19.1
  Top Layer w10: C200.2 2969,3070 v1(2994,3045) ; v1(3924,3042) 4687.48,3042 C190.2 4863.4,2855.92 U19.1 ; C183.2@5278.5,2859 C183.2@5286,2859 ; C183.2 5354.91,2859 5389.79,2893.88 L180.2 5475.29,2893.88 5493.91,2875.26 5493.91,2810.69 5508.6,2796 R180.2
  Top Layer w20: C190.2 5278.5,2861 C183.2@5293,2861
  Bottom Layer w10: v1(2994,3045) 2995.5,3043.5 3922.5,3043.5 v1(3924,3042)
V5.0: C140.2 C160.2 C180.2 C212.2 FB1.2 J1.10 L14.1 L160.1 U14.11 U16.5 U18.4 U18.5 U21.34 U21.40 | length 4129.8
  Top Layer w6: U18.4 U18.5
  Top Layer w10: L160.1@3887,1461.37 3896.37,1452 3922,1452 3930.74,1443.26 U16.5 4008.97,1383.97 C160.2 4140,1387 v1(4162,1409) ; v1(3935,3890) C140.2 3950,3835 3992.05,3835 3992.17,3835.12 L14.1 ; U14.11 4395.79,3499.21 v1(4400,3495) ; J1.10 4494.96,1266.91 4494.96,1403.96 v1(4496,1405) ; v1(4861,1932) 4861,2010 4913.1,2062.1 U21.34 ; U21.40@5040.79,1969.57 U21.40@5040.87,1969.49 ; U21.40 5040.87,1980.33 U21.40@5040.87,1969.49 ; C212.2@5040.87,1902.5 v1(5040.87,1936) U21.40@5040.87,1969.49 ; C212.2@5041.13,1902.5 C212.2@5045,1898.64 ; U21.40@5041.13,1969.22 U21.40@5040.87,1969.49 ; C212.2@5044.5,1896.14 C212.2@5044.5,1898.14
  Top Layer w20: v1(5565,2070) FB1.2 ; U18.5 5659.57,3009.2 5738.8,3009.2 C180.2 v1(5739,3062)
  Bottom Layer w10: v1(4162,1409) 4164,1407 4494,1407 v1(4496,1405) 4861,1770 v1(4861,1932) 4863,1934 5038.87,1934 v1(5040.87,1936) 5164,1936 5431,1936 v1(5565,2070)
  Bottom Layer w20: v1(5565,2070) 5565,2888 v1(5739,3062)
V-3.3A: C71.2 C102.2 C103.2 C111.2 C170.2 R170.2 U7.2 U10.2 U11.2 U17.5 | length 874.2
  Top Layer w10: v1(1936,1827) 1936,1822.13 1947.3,1810.83 1947.3,1792.18 C103.2 ; C103.2@1961.91,1778.48 1965.61,1774.78 2019.86,1774.78 C102.2 2021.2,1773.84 2021.2,1847.06 U10.2 ; v1(2304,1269) C170.2 2311.5,1331 C170.2@2313.53,1333.03 ; R170.2@2311,1498.43 R170.2@2311,1501.6 ; R170.2 R170.2@2316.57,1499.43 ; R170.2@2333.22,1512.69 2318.54,1498 2348,1468.54 2348,1367.5 C170.2@2313.53,1333.03 ; U17.5 C170.2@2313.53,1333.03 ; U11.2@2565,1857.09 U11.2 C111.2 2565.18,1774.82 2606.82,1774.82 v1(2607,1775) ; v1(2886.5,1860.5) 2921.64,1895.64 C71.2 3024.78,1895.64 3031.21,1902.07 3031.21,1905.39 3045,1919.17 U7.2
V-4: C162.2 C163.2 C171.2 L161.2 R160.2 U17.2 U17.3 | length 1767.4
  Top Layer w10: U17.3 U17.2 2511.95,1370.43 C171.2 2715.52,1396.48 2871,1241 L161.2@3772,1241 ; 3710.43,1240.43 L161.2 C163.2 3814.6,1187 3854.6,1227 3859.52,1222.08 C162.2
pads on no net: D1.2 D1.4 D2.2 D2.4 D16.2 J1.11 J1.12 M1.0 M2.0 M3.0 M4.0 U1.4 U1.6 U1.15 U1.16 U1.17 U1.20 U1.23 U1.24 U1.25 U1.28 U1.33 U1.34 U1.35 U1.36 U1.37 U1.38 U1.44 U1.45 U1.46 U1.47 U1.48 U2.1 U12.3 U14.3 U21.15 U21.16 U21.17 U21.18 U21.19 U21.20 U21.21 U21.25 U21.26 U21.27 U21.28 U21.29 U21.30 U21.31 U21.32 U21.33 U21.39
copper on no net: | length 6.8
  Top Layer w8: v1@5312.21,2080.79 v1(5317,2076)

## Polygon pours and split planes (outlines as drawn)
V3.3 on Layer 2 "Layer 2-V3.3" (solid, pour order 15): 3200,3730 3200,1010 5990,1010 5990,3041 3695,3041 3695,3730
V3.3A on Layer 2 "Layer 2-V3.3A" (solid, pour order 11): 1660,3730 1660,1880 3190,1880 3190,3730
V-3.3A on Layer 2 "V-3.3A_L03_P016" (solid, pour order 16): 1660,1870 3190,1870 3190,1010 1660,1010
V5.0 on Layer 2 "Layer 2-V5.0" (solid, pour order 13): 3705,3990 5990,3990 5990,3051 3705,3051
HV on Layer 2 "Layer 2-HV 1" (solid, pour order 5): 1010,1010 1010,3990 1650,3990 1650,1010
HV on Layer 2 "Layer 2-HV" (solid, pour order 9): 1110,3990 3695,3990 3695,3740 1110,3740
GND on Layer 1 "Top Layer-No Net" (solid, pour order 3): 1000,1000 6000,1000 6000,4000 1000,4000

## Other copper
Top Layer:
  text "RadiantNano / Test PCB Rev 1" at 4670,3356 h80

## Silkscreen, mask and mechanical layers (free items; w line width, h text height)
Top Overlay:
  lines w6: 1100,1340 1100,1890 1700,1890 1700,1340 1100,1340 ; 1100,1931 1700,1931 1700,2481 1100,2481 1100,1931 ; 1100,2520 1100,3070 1700,3070 1700,2520 1100,2520 ; 1100,3110 1100,3660 1700,3660 1700,3110 1100,3110